# Altium PCB ASIC_test_adapter.PcbDoc
Units mm, origin at the board's own origin, x right, y up, seen from the top; angles counter-clockwise.
Board outline 49.2 x 49.2 mm, 4 copper layers (Top Layer, Layer 1, Layer 2, Bottom Layer), stack 1.539 mm thick; 56 components, 61 nets, 303 pads, 71 vias.
Unrouted connection lines stored in the file: 57.
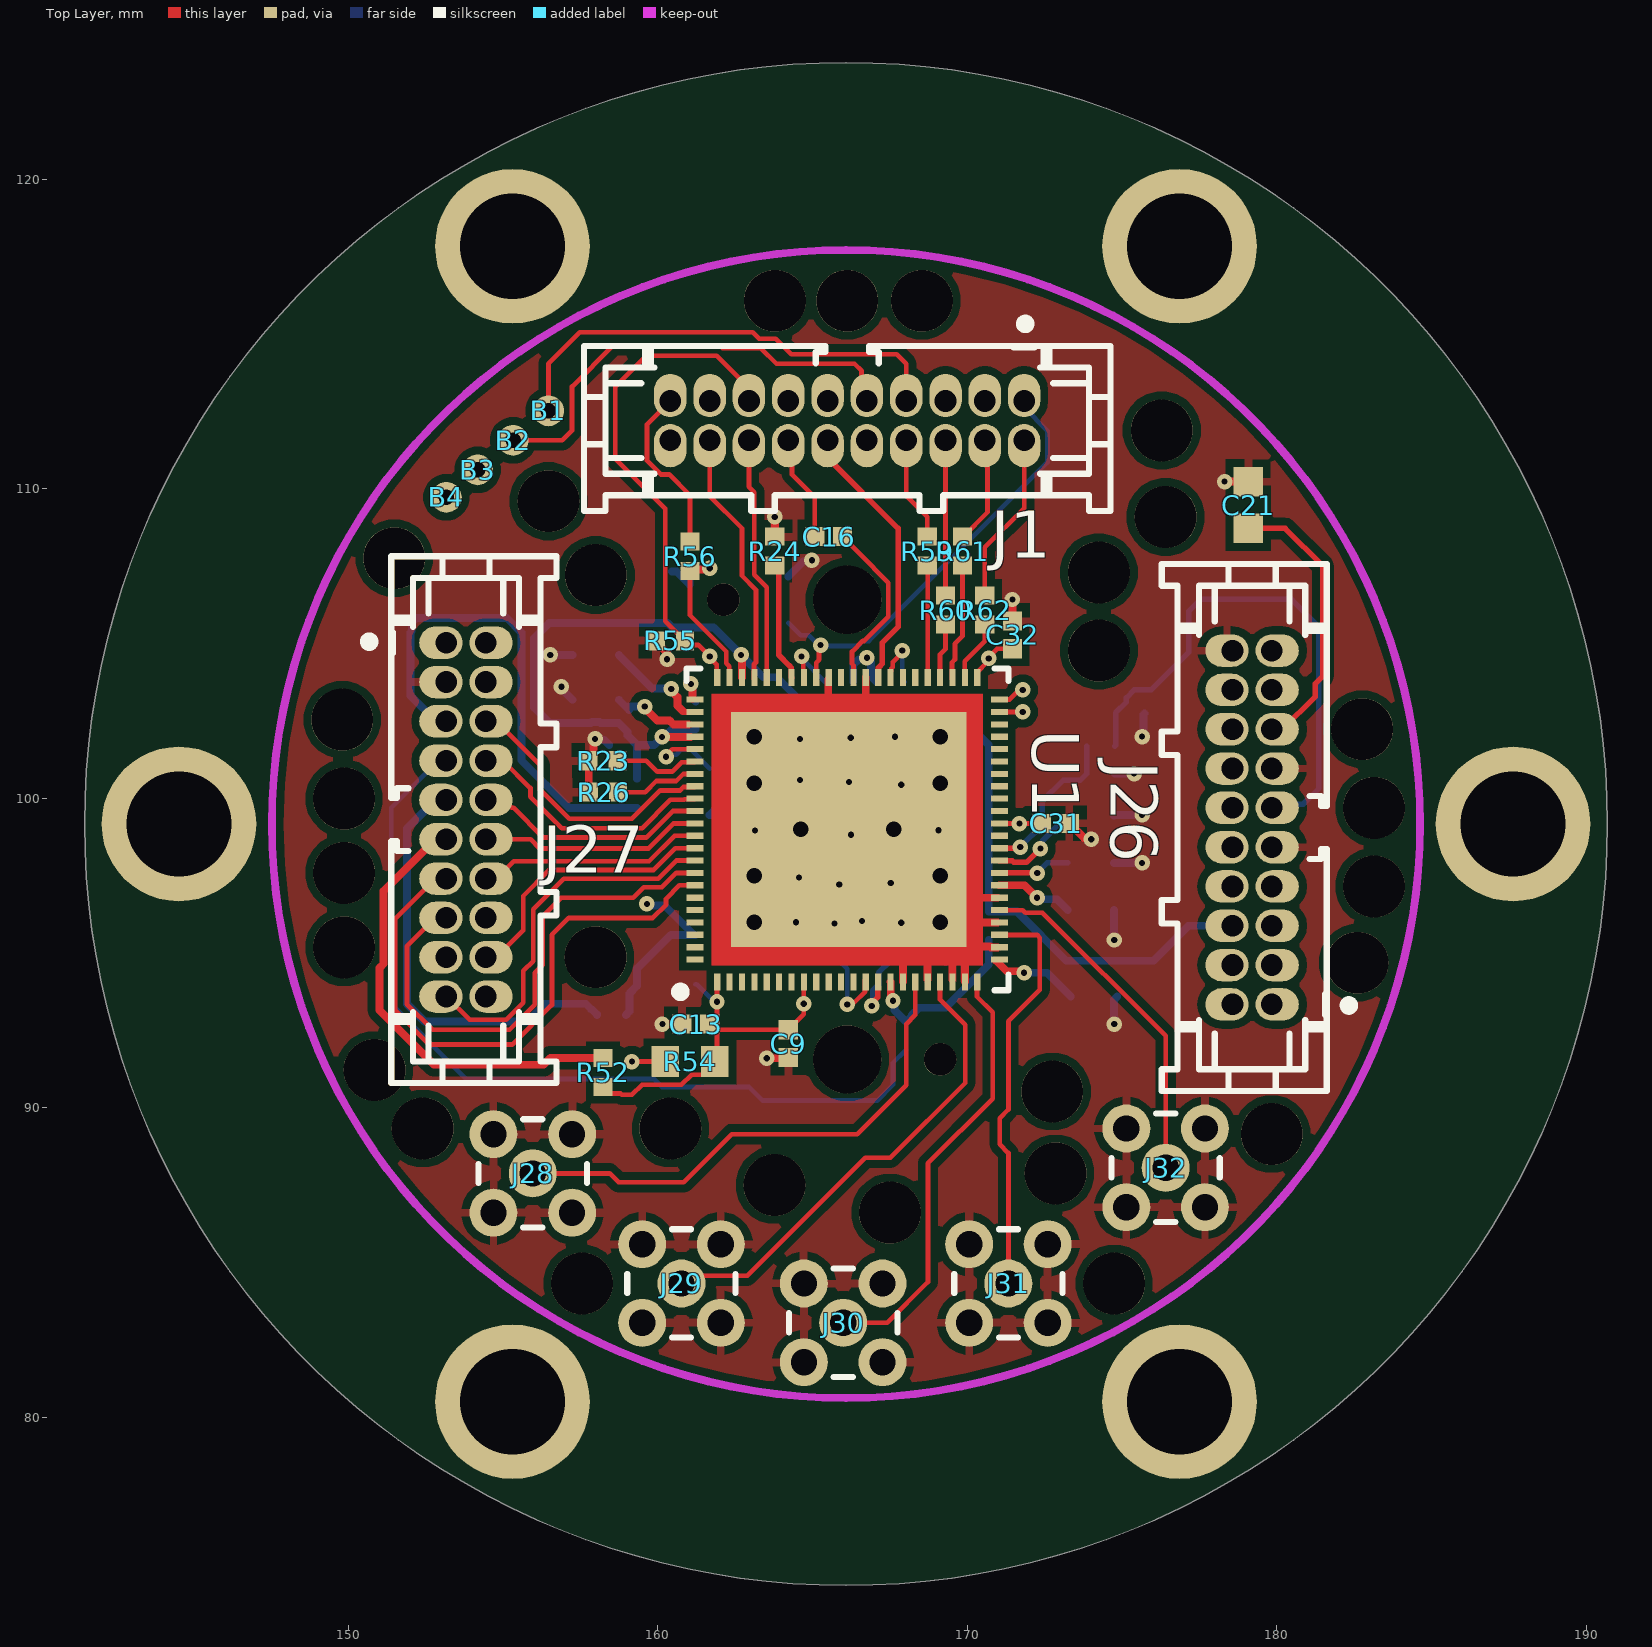
[diagram p0: Top Layer view]
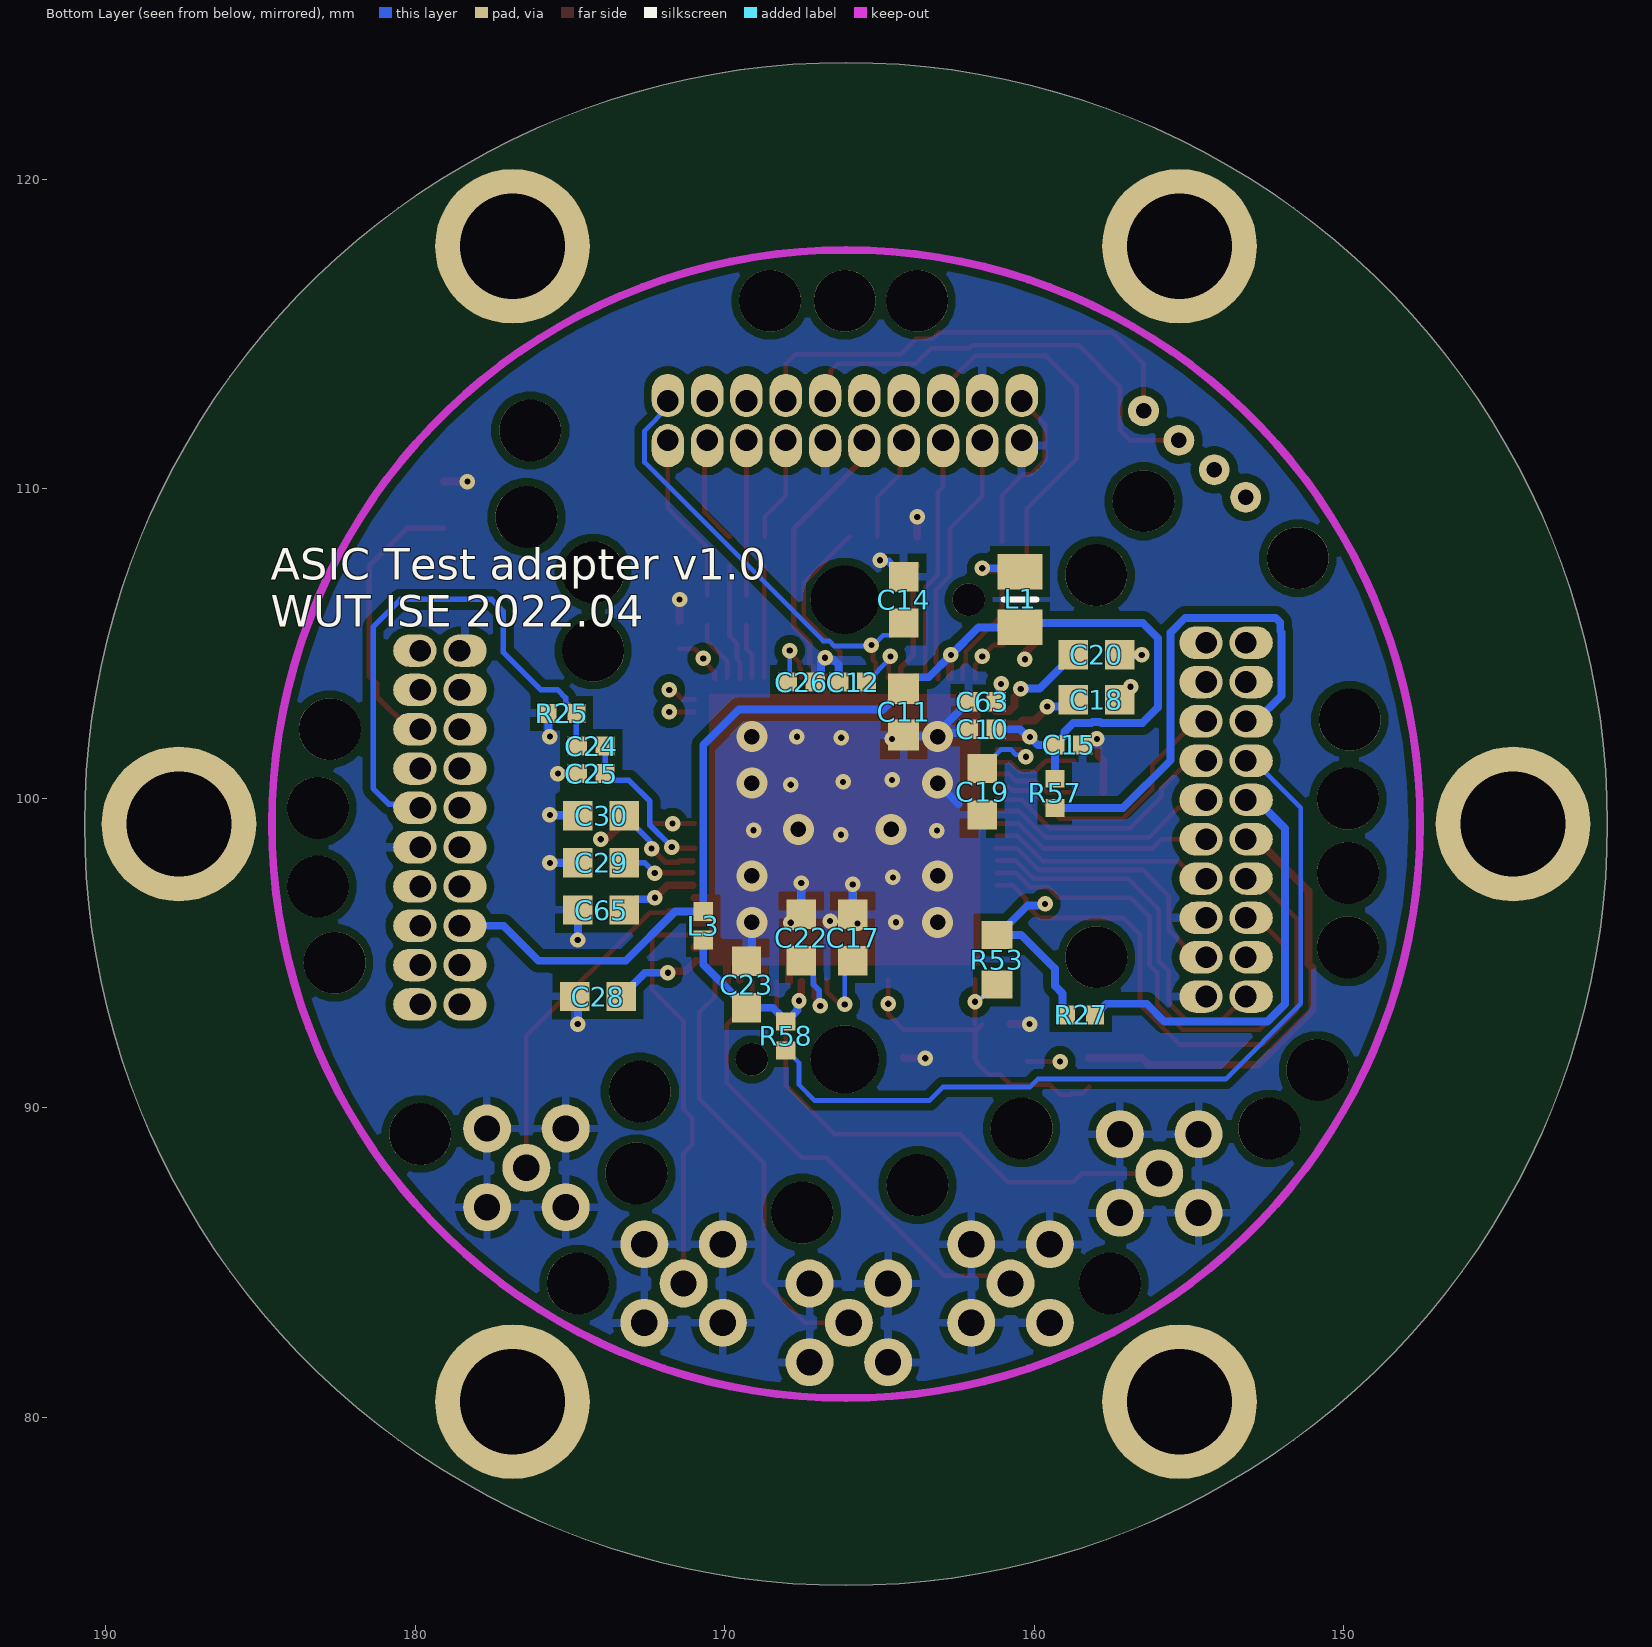
[diagram p1: Bottom Layer view, seen from below]
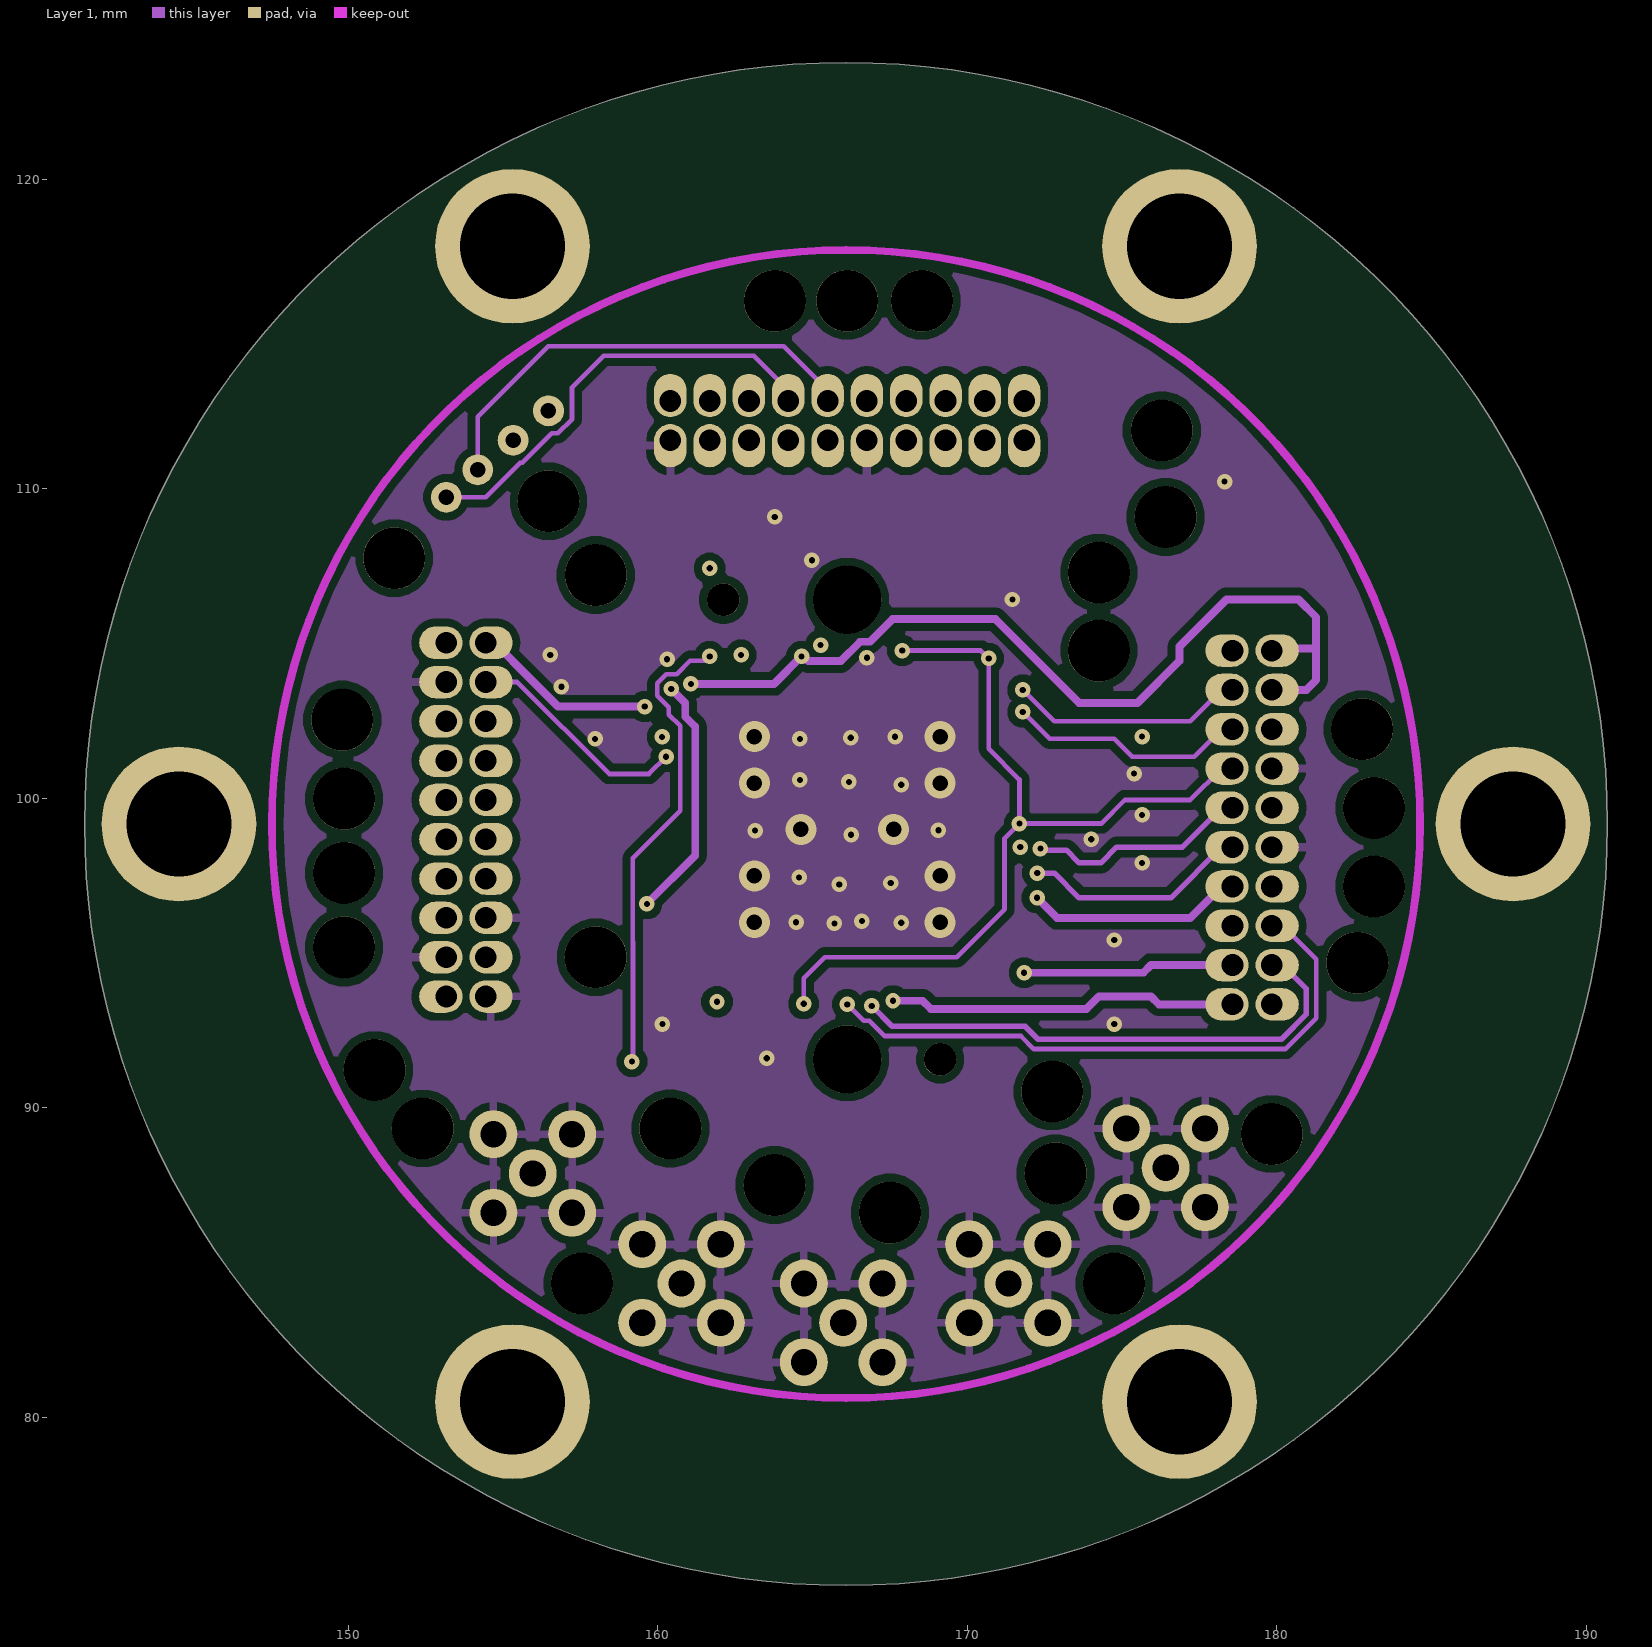
[diagram p2: Layer 1]
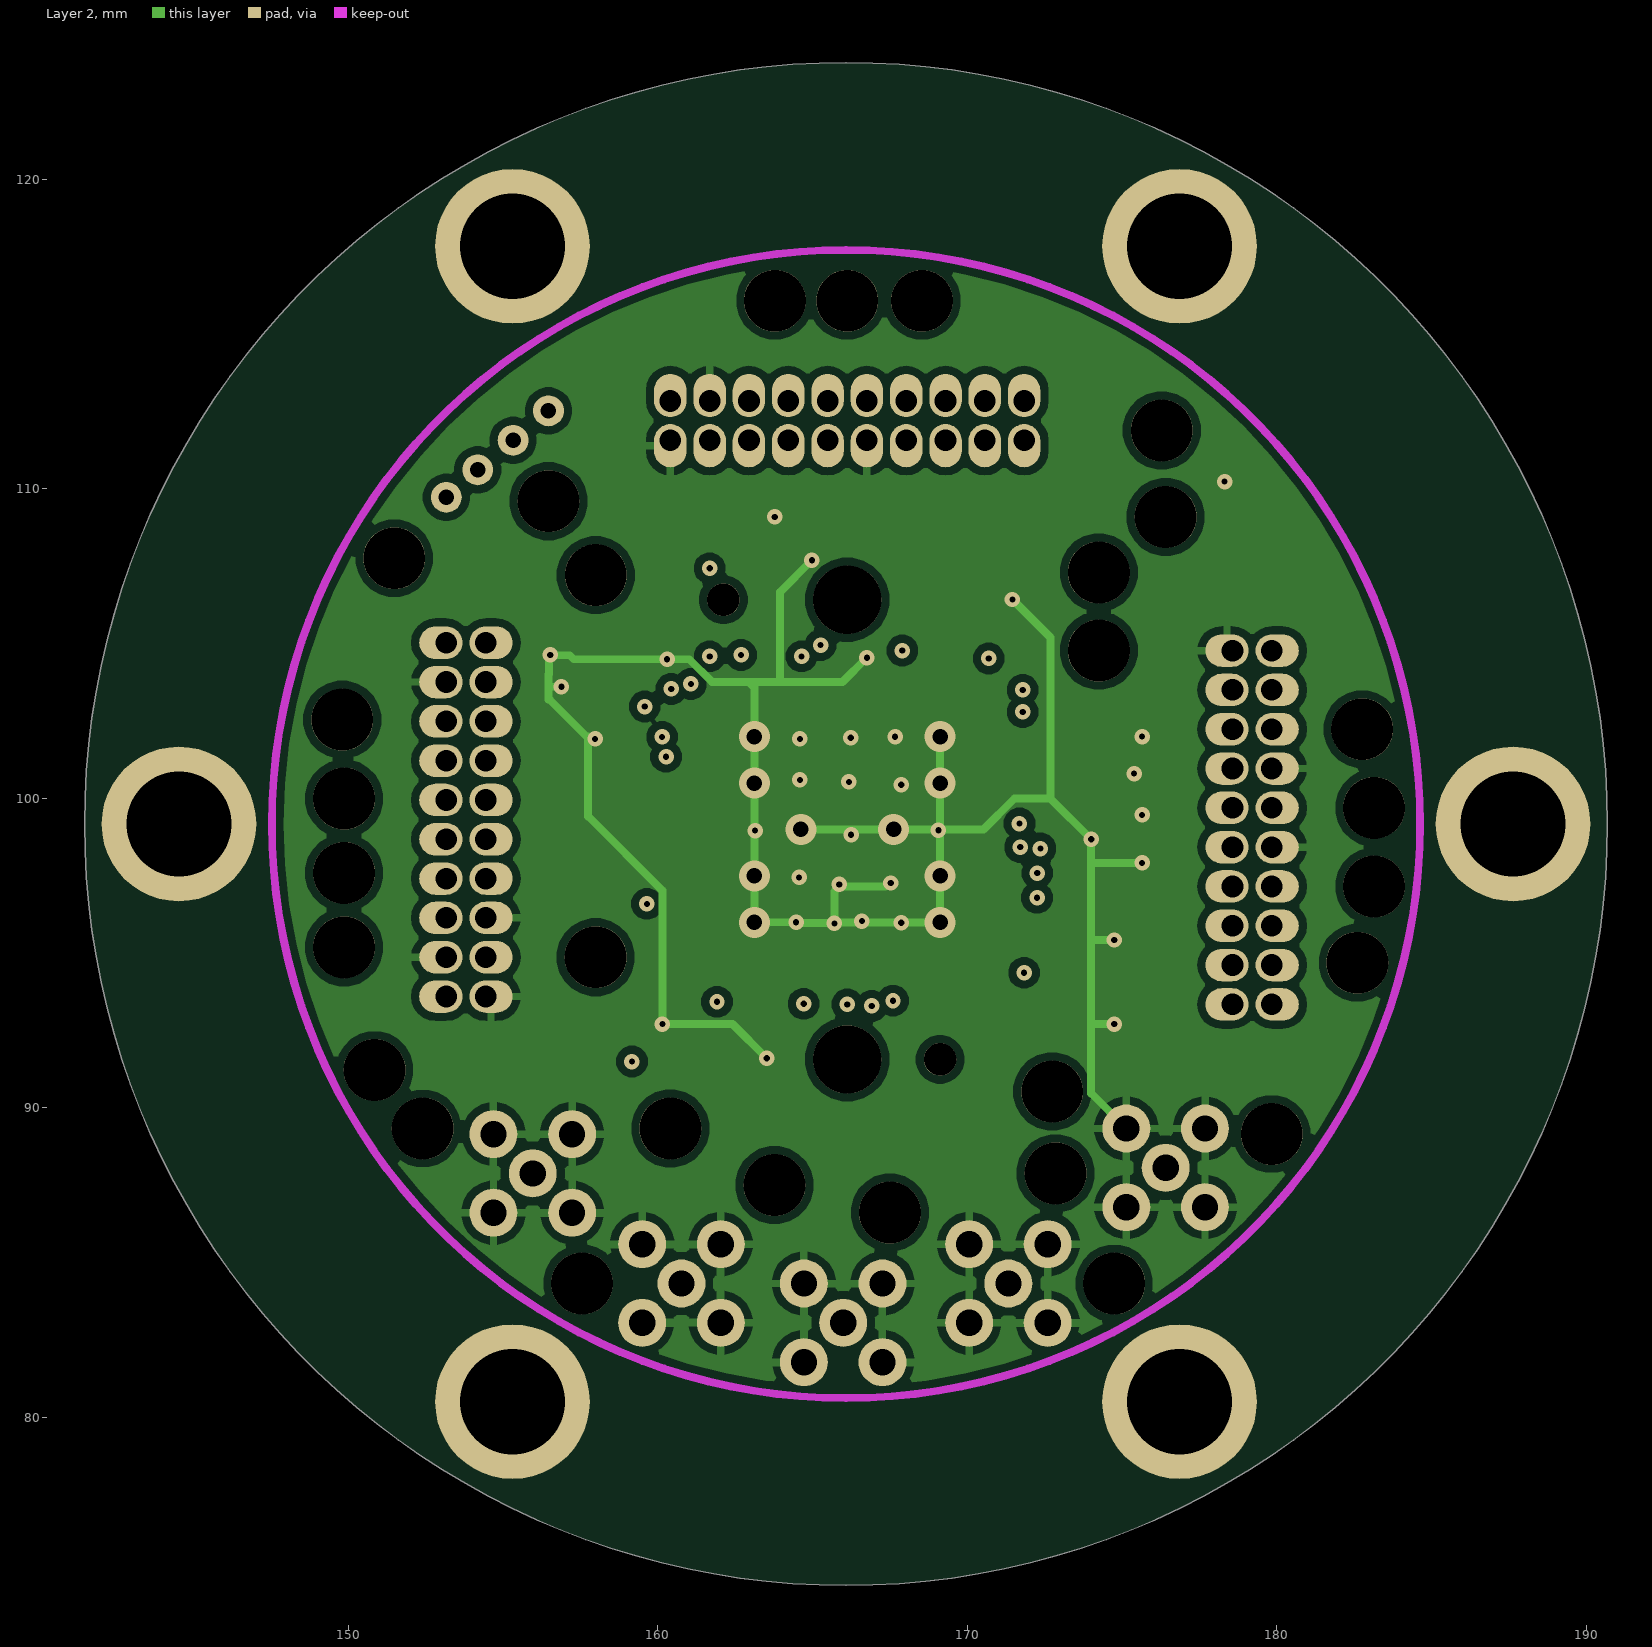
[diagram p3: Layer 2]
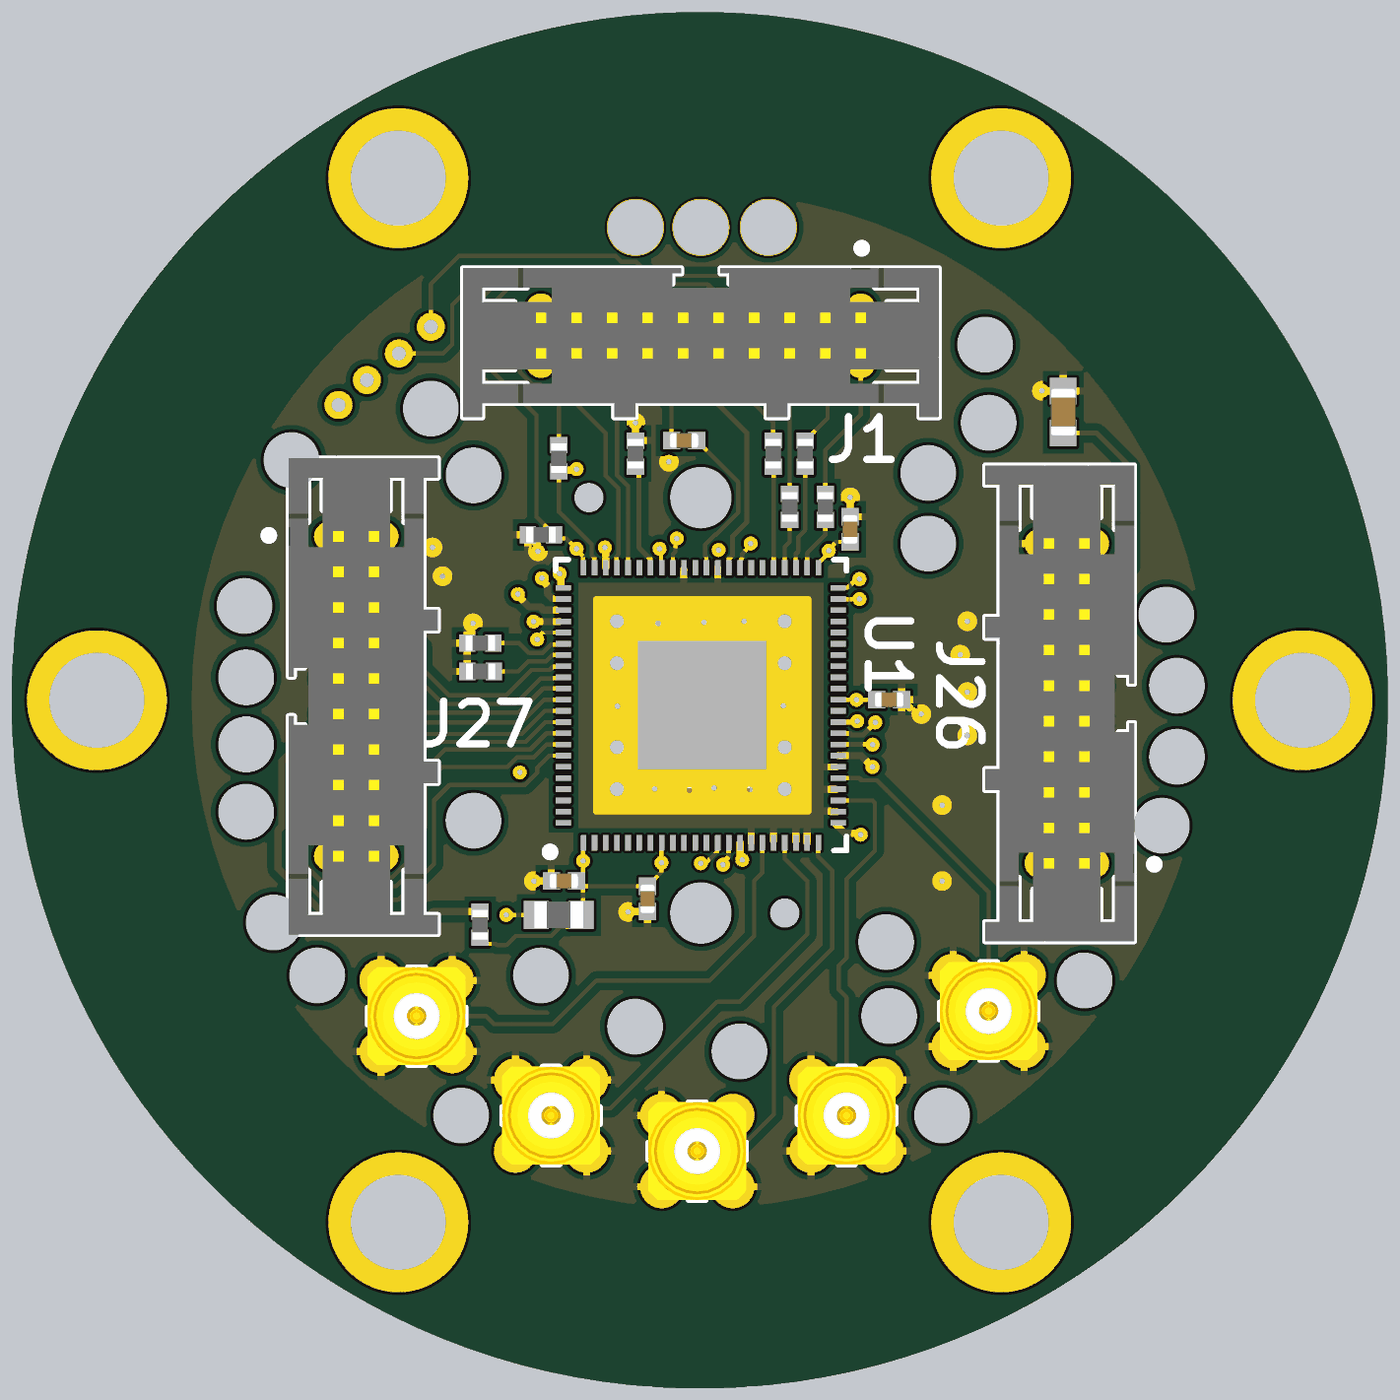
[diagram p4: 3D render of the assembled board from above, using the file's embedded part models]
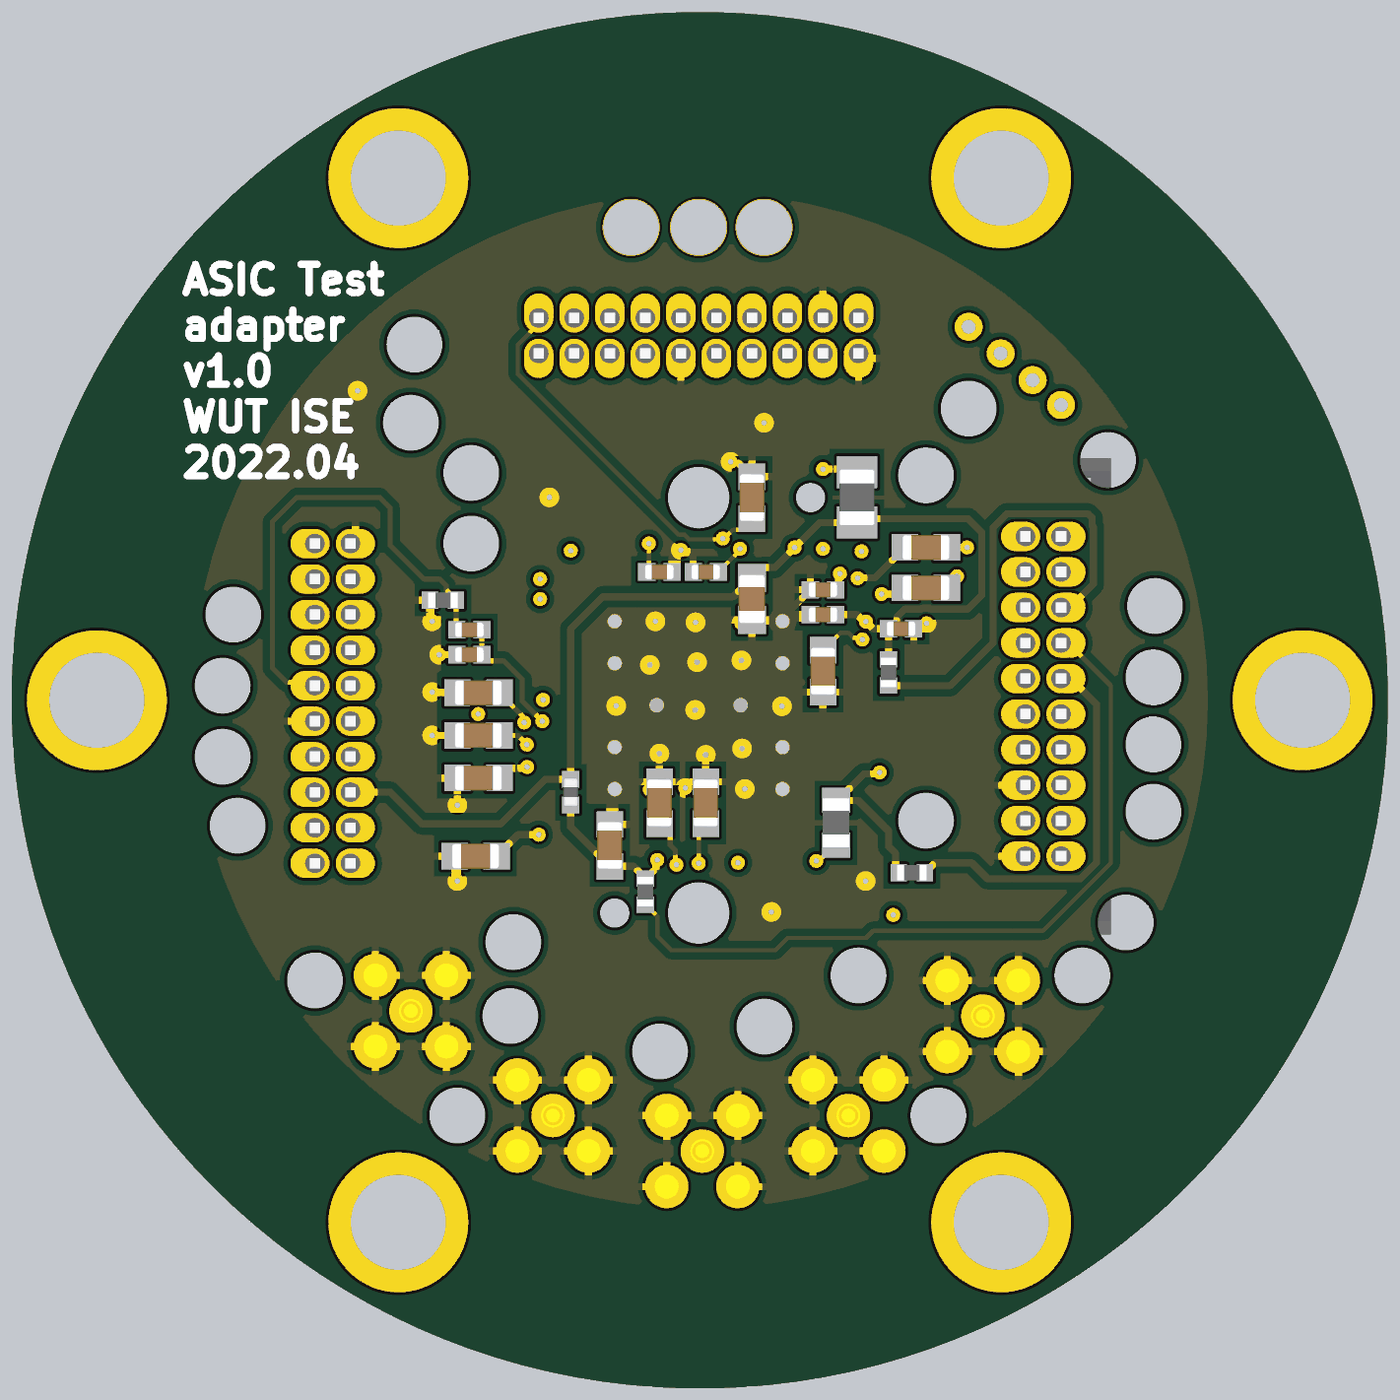
[diagram p5: 3D render of the assembled board from below, using the file's embedded part models]

## Layer stack, top to bottom
Top Solder: solder mask 0.0102, Solder Resist, Dk 3.5
Top Layer: signal copper 0.018
Dielectric 2: prepreg 0.1803, PP-021, Dk 4.7
Dielectric 4: prepreg 0.1803, PP-021, Dk 4.7
Layer 1: signal copper 0.035
Dielectric 1: core 0.7112, Core-039, Dk 4.8
Layer 2: signal copper 0.035
Dielectric 5: prepreg 0.1803, PP-021, Dk 4.7
Dielectric 3: prepreg 0.1803, PP-021, Dk 4.7
Bottom Layer: signal copper 0.018
Bottom Solder: solder mask 0.0102, Solder Resist, Dk 3.5

## Board outline
141.476,99.173 ccw(c166.076,99.173) 166.076,74.573 ccw(c166.076,99.173) 190.676,99.173 ccw(c166.076,99.173) 166.076,123.773 ccw(c166.076,99.173)

## Design rules (kind name [scope] priority, off if disabled: settings)
Clearance [All] p1: gap=0.127 ignorepadtopadclearanceinfootprint=FALSE except(0.254: Arc-Poly Track-Poly SMDPad-Poly THPad-Poly Via-Poly Fill-Poly Poly-Poly)
HoleSize [All] p1: absolutevalues=TRUE maxlimit=5.08 minlimit=0.2 maxpercent=80.000 minpercent=20.000
MinimumSolderMaskSliver [All] p1 off: minsoldermaskwidth=0.254
PolygonConnect Via [All vs IsVia] p1: connectstyle=Direct reliefconductorwidth=0.254 reliefentries=4 polygonreliefangle="90 Angle" airgapwidth=0.254
PolygonConnect [All] p2: connectstyle=Relief reliefconductorwidth=0.254 reliefentries=4 polygonreliefangle="90 Angle" airgapwidth=0.254
RoomDefinition MAIN [InComponentClass('MAIN')] p1 off: confinementstyle=ConfineIn formatcopy=TRUE lockcomponents=FALSE outline 159.004,72.644 152.019,72.644 152.019,65.532 159.004,65.532
RoutingVias [All] p1: holewidth=0.2 width=0.5 viastyle="Through Hole" minholewidth=0.2 minwidth=0.5 maxholewidth=0.711 maxwidth=1.27
SilkToSilkClearance [All] p1 off: silktosilkclearance=0.254
SilkToSolderMaskClearance [IsPad] p1 off: minsilkscreentomaskgap=0.254 clearancetoexposedcopper=TRUE
SolderMaskExpansion [All] p1: expansion=0.102 istentingtop=FALSE
Width [All] p1: maxlimit=2.54 minlimit=0.127 preferedwidth=0.254
26 further rules are at their usual default settings.

## Components (designator, comment, footprint, x,y, rotation, side; value= is the part's Value field where it differs from the comment)
B1 "Plated Hole" c100h50 156.464,112.522 r0 top
B2 "Plated Hole" c100h50 155.321,111.569 r0 top
B3 "Plated Hole" c100h50 154.178,110.617 r0 top
B4 "Plated Hole" c100h50 153.162,109.728 r0 top
C9 "1uF" CAPC1005X55N 164.211,92.075 r270 top
C10 "1uF" CAPC1005X55N 161.671,102.235 r0 bottom
C11 "10uF" CAPC1608X80N 164.211,102.792 r90 bottom
C12 "1uF" CAPC1005X55N 165.862,103.759 r0 bottom
C13 "1uF" CAPC1005X55N 161.221,92.71 r180 top
C14 "22uF" CAPC1608X90N 164.211,106.417 r90 bottom
C15 "1uF" CAPC1005X55N 158.877,101.727 r0 bottom
C16 "22pF" CAPC1005X55N 165.516,108.458 r0 top
C17 "22uF" CAPC1608X90N 165.862,95.504 r270 bottom
C18 "22uF" CAPC1608X90N 157.988,103.188 r180 bottom
C19 "22uF" CAPC1608X90N 161.671,100.215 r270 bottom
C20 "22uF" CAPC1608X90N 157.988,104.634 r0 bottom
C21 "22uF" CAPC1608X90N 179.07,109.474 r270 top
C22 "22uF" CAPC1608X90N 167.519,95.504 r270 bottom
C23 "22uF" CAPC1608X90N 169.291,93.986 r90 bottom
C24 "22pF" CAPC1005X55N 174.311,101.692 r180 bottom
C25 "22pF" CAPC1005X55N 174.311,100.803 r0 bottom
C26 "1uF" CAPC1005X55N 167.519,103.759 r0 bottom
C28 "22uF" CAPC1608X90N 174.089,93.599 r180 bottom
C29 "22uF" CAPC1608X90N 173.99,97.917 r180 bottom
C30 "22uF" CAPC1608X90N 173.99,99.441 r180 bottom
C31 "1uF" CAPC1005X55N 172.847,99.192 r180 top
C32 "1uF" CAPC1005X55N 171.453,105.283 r270 top
C63 "4.7uF" CAPC1005X55N 161.671,103.124 r180 bottom
C65 "22uF" CAPC1608X90N 173.99,96.393 r180 bottom
J1 "Header 20" 3M_45220-600230 166.116,112.204 r180 top
J26 "Header 20" 3M_45220-600230 179.197,99.06 r90 top
J27 "Header 20" 3M_45220-600230 153.797,99.314 r270 top
J28 "Coax_1Female_1Shield" SAMTEC_MMCX-J-P-H-ST-TH1 155.956,87.884 r0 top
J29 "Coax_1Female_1Shield" SAMTEC_MMCX-J-P-H-ST-TH1 160.761,84.328 r0 top
J30 "Coax_1Female_1Shield" SAMTEC_MMCX-J-P-H-ST-TH1 165.986,83.058 r0 top
J31 "Coax_1Female_1Shield" SAMTEC_MMCX-J-P-H-ST-TH1 171.323,84.328 r0 top
J32 "Coax_1Female_1Shield" SAMTEC_MMCX-J-P-H-ST-TH1 176.403,88.065 r0 top
L1 "4.7uH" INDC2012X145N 160.454,106.426 r270 bottom
L3 "100nH" INDC1005X55N 170.688,95.885 r270 bottom
R23 "10k" RESC1005X40N 158.231,101.219 r180 top
R24 "10k" RESC1005X40N 163.777,107.988 r90 top
R25 "100" RESC1005X40N 175.255,102.747 r180 bottom
R26 "10k" RESC1005X40N 158.242,100.203 r180 top
R27 "0" RESC1005X40N 158.496,93.005 r180 bottom
R52 "0" RESC1005X40N 158.224,91.148 r90 top
R53 "0R1" RESC1608X55N 161.203,94.792 r270 bottom
R54 "1k33" RESC1608X55N 161.036,91.498 r180 top
R55 "1k" RESC1005X40N 160.401,105.088 r180 top
R56 "33" RESC1005X40N 161.036,107.823 r90 top
R57 "0" RESC1005X40N 159.327,100.165 r270 bottom
R58 "0" RESC1005X40N 168.021,92.329 r270 bottom
R59 "33" RESC1005X40N 168.703,107.988 r90 top
R60 "33" RESC1005X40N 169.291,106.083 r90 top
R61 "33" RESC1005X40N 169.839,107.988 r90 top
R62 "33" RESC1005X40N 170.561,106.083 r90 top
U1 "CCNV1_C1" "QFN88-0,4(10X10) - PODSTAWKA 2 PASTA" 166.116,98.992 r90 top

## Footprints (in the part's own frame and the unit in brackets; to place one, negate y for a bottom-side part, rotate by r counter-clockwise, add the part's x,y. Pads: shape width x height; smd on the part's side, far side on the other; paste and mask are expansions set on the pad)
3M_45220-600230 [mm] "20 Contacts - 1.27mm (0.050\") Pitch - Shrouded Boardmount Vertical Header Without Latch/Ejectors, 452 Series"
  oval 1.05x1.4 hole 0.7 copper offset 0,-0.175: 1(-5.715,-0.635) 3(-4.445,-0.635) 5(-3.175,-0.635) 7(-1.905,-0.635) 9(-0.635,-0.635) 11(0.635,-0.635) 13(1.905,-0.635) 15(3.175,-0.635) 17(4.445,-0.635) 19(5.715,-0.635)
  oval 1.05x1.4 hole 0.7 copper offset 0,0.175: 2(-5.715,0.635) 4(-4.445,0.635) 6(-3.175,0.635) 8(-1.905,0.635) 10(-0.635,0.635) 12(0.635,0.635) 14(1.905,0.635) 16(3.175,0.635) 18(4.445,0.635) 20(5.715,0.635)
  silkscreen extent -8.51,-3.28 8.51,2.92, body extent -8.51,-2.41 8.51,2.92, height 5.65
c100h50 [mm] "Plated Through Hole: Hole Dia.=0.5mm Pad Dia.=1.0mm"
  round 1 hole 0.5: 1(0,0)
CAPC1005X55N [mm] "Capacitor, Non-Polarized, Chip; 1.00mm L X 0.50mm W X 0.70mm H, IPC Medium Density"
  rect 0.62x0.62 smd: 1(-0.45,0) 2(0.45,0)
  body extent -0.52,-0.27 0.53,0.28, height 0.55
CAPC1608X80N [mm] "Chip Capacitor, Body 1.6x0.8mm IPC Medium Density"
  rect 1x1 smd: 1(-0.75,0) 2(0.75,0)
  body extent -0.87,-0.47 0.88,0.48, height 0.8
CAPC1608X90N [mm] "Chip Capacitor, Body 1.6x0.8mm IPC Medium Density"
  rect 0.95x0.95 smd: 1(-0.75,0) 2(0.75,0)
  body extent -0.85,-0.45 0.85,0.45, height 0.9
INDC1005X55N [mm] "Chip Inductor, 2-Leads, EIA 0402, Metric 1005, Body 1x0.5mm, 0402IPC Medium Density"
  rect 0.6x0.62 smd: 1(-0.46,0) 2(0.46,0)
  body extent -0.52,-0.27 0.53,0.28, height 0.55
INDC2012X145N [mm] "Chip Inductor, EIA 0805, Metric 2012, Body 2.0x1.25mm, IPC Medium Density"
  rect 1.15x1.45 smd: 1(-0.9,0) 2(0.9,0)
  silkscreen extent 0,-0.53 0,0.53, body extent -1,-0.62 1,0.63, height 1.45
"QFN88-0,4(10X10) - PODSTAWKA 2 PASTA" [mm] "QFN88 p=0,4mm LxWxH=10x10x0,8mm"
  round 1.05 hole 1.05 unplated: 0(-7.425,-3) 0(7.425,4)
  round 2.2 hole 2.2 unplated: 0(-7.425,0) 0(7.425,0)
  rect 0.55x0.2 smd mask+0.1: 1(-4.917,4.2) 2(-4.917,3.8) 3(-4.917,3.4) 4(-4.917,3) 5(-4.917,2.6) 6(-4.917,2.2) 7(-4.917,1.8) 8(-4.917,1.4) 9(-4.917,1) 10(-4.917,0.6) 11(-4.917,0.2) 12(-4.917,-0.2) 13(-4.917,-0.6) 14(-4.917,-1) 15(-4.917,-1.4) 16(-4.917,-1.8) 17(-4.917,-2.2) 18(-4.917,-2.6) 19(-4.917,-3) 20(-4.917,-3.4) 21(-4.917,-3.8) 22(-4.917,-4.2) 45(4.913,-4.2) 46(4.913,-3.8) 47(4.913,-3.4) 48(4.913,-3) 49(4.913,-2.6) 50(4.913,-2.2) 51(4.913,-1.8) 52(4.913,-1.4) 53(4.913,-1) 54(4.913,-0.6) 55(4.913,-0.2) 56(4.913,0.2) 57(4.913,0.6) 58(4.913,1) 59(4.913,1.4) 60(4.913,1.8) 61(4.913,2.2) 62(4.913,2.6) 63(4.913,3) 64(4.913,3.4) 65(4.913,3.8) 66(4.913,4.2)
  rect 0.2x0.55 smd mask+0.1: 23(-4.2,-4.912) 24(-3.8,-4.912) 25(-3.4,-4.912) 26(-3,-4.912) 27(-2.6,-4.912) 28(-2.2,-4.912) 29(-1.8,-4.912) 30(-1.4,-4.912) 31(-1,-4.912) 32(-0.6,-4.912) 33(-0.2,-4.912) 34(0.2,-4.912) 35(0.6,-4.912) 36(1,-4.912) 37(1.4,-4.912) 38(1.8,-4.912) 39(2.2,-4.912) 40(2.6,-4.912) 41(3,-4.912) 42(3.4,-4.912) 43(3.8,-4.912) 44(4.2,-4.912) 67(4.2,4.913) 68(3.8,4.913) 69(3.4,4.913) 70(3,4.913) 71(2.6,4.913) 72(2.2,4.913) 73(1.8,4.913) 74(1.4,4.913) 75(1,4.913) 76(0.6,4.913) 77(0.2,4.913) 78(-0.2,4.913) 79(-0.6,4.913) 80(-1,4.913) 81(-1.4,4.913) 82(-1.8,4.913) 83(-2.2,4.913) 84(-2.6,4.913) 85(-3,4.913) 86(-3.4,4.913) 87(-3.8,4.913) 88(-4.2,4.913)
  rect 7.6x7.6 smd paste-1.5: 89(0,-0.05)
  silkscreen extent -5.39,-5.21 5.21,5.54, body extent -2.55,-2.52 2.53,2.56, height 2.54
RESC1005X40N [mm] "Chip Resistor, EIA 0402, Metric 1005, Body 1.0x0.5mm, IPC Medium Density"
  rect 0.58x0.62 smd: 1(-0.47,0) 2(0.47,0)
  body extent -0.52,-0.27 0.53,0.28, height 0.4
RESC1608X55N [mm] "Chip Resistor, EIA 0603, Metric 1608, Body 1.6x0.8mm, IPC Medium Density"
  rect 0.9x1 smd: 1(-0.8,0) 2(0.8,0)
  body extent -0.87,-0.47 0.88,0.48, height 0.55
SAMTEC_MMCX-J-P-H-ST-TH1 [mm] "Straight Through-hole 50 Ohm Micro Mini RF Jack, MMCX Serie"
  round 1.55 hole 0.85: 1(0,0) 2(-1.27,-1.27) 2(-1.27,1.27) 2(1.27,-1.27) 2(1.27,1.27)
  silkscreen extent -1.75,-1.75 1.75,1.75, body extent -1.75,-1.75 1.75,1.75, height 4.35

## Part data
B1 B2 B3 B4: library part PLATED_HOLE0.5_PAD1.0, "Single Terminal Socket", Author="CERN DEM JMW", Component Type="Standard (No BOM)", ComponentHeight=0mm, CreateDate=06.01.2020, Family="Plated Hole", HelpURL=Undefined, LatestRevisionDate=06.01.2020, Mounted=No, PackageDescription="Plated Through Hole: Hole Dia.=0.5mm Pad Dia.=1.0mm", Part Description="Plated Through Hole: Hole Dia.=0.5mm Pad Dia.=1.0mm", Part Number=PLATED_HOLE0.5_PAD1.0, Pin Count=1, Sense=No, SMD=No, Socket=No, Status=None
C9 C10 C12 C13 C15 C26 C31 C32: library part CC0402_1UF_16V_10%_X5R, "Non-polarised capacitor", Case=0402, Manufacturer=GENERIC, Manufacturer1 ComponentHeight=0.55mm, Manufacturer1 Example=TDK, Manufacturer1 Part Number=C1005X5R1C105KT, Tolerance=±10%, Voltage=16V, Author="CERN DEM JLC", Component Type=Standard, CreateDate=25.10.2012, HelpURL=\\cern.ch\dfs\Applications\Altium\Datasheets\CC0402_X5R_TDK_C.pdf, LatestRevisionDate=25.10.2012, Manufacturer Part Number=CC0402_1UF_16V_10%_X5R, Mounted=Yes, Part Description="SMD Multilayer Chip Ceramic Capacitor", Part Number=CC0402_1UF_16V_10%_X5R, Pin Count=2, Sense=No, SMD=Yes, Socket=No, Status=Preferred, TC=X5R
C11: library part CC0603_10UF_10V_10%_X5R, "Non-polarised capacitor", Case=0603, Manufacturer=GENERIC, Manufacturer1 ComponentHeight=0.8mm, Manufacturer1 Example=MURATA, Manufacturer1 Part Number=GRM188R61A106KE69D, Tolerance=±10%, Voltage=10V, Author="CERN DEM JLC", Component Type=Standard, CreateDate=31.01.2017, HelpURL=\\cern.ch\dfs\Applications\Altium\Datasheets\CC0603_MURATA_GRM188R61A106KE69D.pdf, LatestRevisionDate=31.01.2017, Manufacturer Part Number=CC0603_10UF_10V_10%_X5R, Mounted=Yes, Part Description="SMD Multilayer Chip Ceramic Capacitor", Part Number=CC0603_10UF_10V_10%_X5R, Pin Count=2, Sense=No, SMD=Yes, Socket=No, Status=None, TC=X5R
C14 C17 C18 C19 C20 C21 C22 C23 C28 C29 C30 C65: library part CC0603_22UF_10V_20%_X5R, "Non-polarised capacitor", Case=0603, Manufacturer=GENERIC, Manufacturer1 ComponentHeight=0.9mm, Manufacturer1 Example=TDK, Manufacturer1 Part Number=C1608X5R1A226M080, Tolerance=±20%, Voltage=10V, Author="CERN DEM BC", Component Type=Standard, CreateDate=03.12.2020, HelpURL=\\cern.ch\dfs\Applications\Altium\Datasheets\CC0603_X5R_TDK_C.pdf, LatestRevisionDate=03.12.2020, Manufacturer Part Number=CC0603_22UF_10V_20%_X5R, Mounted=Yes, Part Description="SMD Multilayer Chip Ceramic Capacitor", Part Number=CC0603_22UF_10V_20%_X5R, Pin Count=2, Sense=No, SMD=Yes, Socket=No, Status=None, TC=X5R
C16 C24 C25: library part CC0402_22PF_50V_5%_C0G, "Non-polarised capacitor", Case=0402, Manufacturer=GENERIC, Manufacturer1 ComponentHeight=0.55mm, Manufacturer1 Example=KEMET, Manufacturer1 Part Number=C0402C220J5GACTU, Tolerance=±5%, Voltage=50V, Author="CERN DEM JLC", Component Type=Standard, CreateDate=03.12.2007, HelpURL="\\cern.ch\dfs\Applications\Altium\Datasheets\CC0402_C0G_KEMET_(Commercial Grade).pdf", LatestRevisionDate=03.12.2007, Manufacturer Part Number=CC0402_22PF_50V_5%_C0G, Mounted=Yes, Part Description="SMD Multilayer Chip Ceramic Capacitor", Part Number=CC0402_22PF_50V_5%_C0G, Pin Count=2, Sense=No, SMD=Yes, Socket=No, Status=Preferred, TC=C0G/NP0
C63: library part CC0402_4.7UF_10V_10%_X5R, "Non-polarised capacitor", Case=0402, Manufacturer=GENERIC, Manufacturer1 ComponentHeight=0.65mm, Manufacturer1 Example=TDK, Manufacturer1 Part Number=C1005X5R1A475K050, Tolerance=±10%, Voltage=10V, Author="CERN DEM BC", Component Type=Standard, CreateDate=10.01.2020, HelpURL=\\cern.ch\dfs\Applications\Altium\Datasheets\CC0402_X5R_TDK_C.pdf, LatestRevisionDate=10.01.2020, Manufacturer Part Number=CC0402_4.7UF_10V_10%_X5R, Mounted=Yes, Part Description="SMD Multilayer Chip Ceramic Capacitor", Part Number=CC0402_4.7UF_10V_10%_X5R, Pin Count=2, Sense=No, SMD=Yes, Socket=No, Status=Preferred, TC=X5R
J1 J26 J27: library part 3M_45220-600230, "Connector 20 Male", Manufacturer=3M, Manufacturer Part Number=45220-600230, Author="CERN DEM MR", Component Type=Standard, ComponentHeight=5.64mm, CreateDate=15.08.2019, Family="Header 20", HelpURL=\\cern.ch\dfs\Applications\Altium\Datasheets\3M_45220-600230.pdf, LatestRevisionDate=15.08.2019, Mounted=Yes, Part Description="20 Contacts - 1.27mm (0.050\") Pitch - Shrouded Boardmount Vertical Header Without Latch/Ejectors, 452 Series", Part Number=3M_45220-600230, Pin Count=20, PressFit=No, Sense=No, SMD=No, Socket=No, Status=None
J28 J29 J30 J31 J32: library part SAMTEC_MMCX-J-P-H-ST-TH1, Manufacturer=SAMTEC, Manufacturer Part Number=MMCX-J-P-H-ST-TH1, Author="CERN DEM JLC", Component Type=Standard, ComponentHeight=4.35mm, CreateDate=05.12.2012, HelpURL=\\cern.ch\dfs\Applications\Altium\Datasheets\SAMTEC_MMCX-J-P-H-ST-TH1.pdf, LatestRevisionDate=05.12.2012, Mounted=Yes, Part Description="Straight Through-hole 50 Ohm Micro Mini RF Jack, MMCX Series", Part Number=SAMTEC_MMCX-J-P-H-ST-TH1, Pin Count=2, PressFit=No, Sense=No, SMD=No, Socket=No, Status=None
L1: library part IND0805_4.7UH_20%_KEMET_L-DWI, "Inductor With Core", Case=0805, Manufacturer=KEMET, Manufacturer Part Number=L0805C4R7MDWIT, Power=360mA, Resistance=0.5R, Tolerance=±20%, Author="CERN DEM JLC", Component Type=Standard, ComponentHeight=1.85mm, CreateDate=26.01.2010, HelpURL="\\cern.ch\dfs\Applications\Altium\Datasheets\IND0805_KEMET_L-DWI .pdf", LatestRevisionDate=26.01.2010, Mounted=Yes, Part Description="Wire Wound Chip Inductors", Part Number=IND0805_4.7UH_20%_KEMET_L-DWI, Pin Count=2, Sense=No, SMD=Yes, Socket=No
L3: library part IND0402_100NH_5%_TDK_MLJ1005, "Inductor", Case=0402, Manufacturer=TDK, Manufacturer Part Number=MLJ1005WR10J, Power=400mA, Resistance=0.30R, Tolerance=±5%, Author="CERN DEM BC", Component Type=Standard, ComponentHeight=0.55mm, CreateDate=13.07.2020, HelpURL=\\cern.ch\dfs\Applications\Altium\Datasheets\IND0402_TDK_MLJ1005.pdf, LatestRevisionDate=13.07.2020, Mounted=Yes, Part Description="SMD Inductor for Standard Circuits, MLJ Series", Part Number=IND0402_100NH_5%_TDK_MLJ1005, Pin Count=2, Sense=No, SMD=Yes, Socket=No
R23 R24 R26: library part R0402_10K_1%_0.0625W_100PPM, "Resistor - 1%", Case=0402, Manufacturer=GENERIC, Manufacturer1 ComponentHeight=0.4mm, Manufacturer1 Example="YAGEO PHYCOMP", Manufacturer1 Part Number=232270671003L, Power=0.0625W, Tolerance=±1%, Author="CERN DEM JLC", Component Type=Standard, CreateDate=03.12.2007, HelpURL=\\cern.ch\dfs\Applications\Altium\Datasheets\R0402_Phycomp_RC0402.pdf, LatestRevisionDate=17.10.2012, Manufacturer Part Number=R0402_10K_1%_0.0625W_100PPM, Mounted=Yes, Part Description="General Purpose Thick Film Chip Resistor", Part Number=R0402_10K_1%_0.0625W_100PPM, Pin Count=2, PressFit=No, Sense=No, SMD=Yes, Socket=No, Status="Not Recommended", TC=±100ppm/°C
R25: library part R0402_100R_1%_0.0625W_100PPM, "Resistor - 1%", Case=0402, Manufacturer=GENERIC, Manufacturer1 ComponentHeight=0.4mm, Manufacturer1 Example="YAGEO PHYCOMP", Manufacturer1 Part Number=232270671001L, Power=0.0625W, Tolerance=±1%, Author="CERN DEM JLC", Component Type=Standard, CreateDate=03.12.2007, HelpURL=\\cern.ch\dfs\Applications\Altium\Datasheets\R0402_Phycomp_RC0402.pdf, LatestRevisionDate=17.10.2012, Manufacturer Part Number=R0402_100R_1%_0.0625W_100PPM, Mounted=Yes, Part Description="General Purpose Thick Film Chip Resistor", Part Number=R0402_100R_1%_0.0625W_100PPM, Pin Count=2, PressFit=No, Sense=No, SMD=Yes, Socket=No, Status="Not Recommended", TC=±100ppm/°C
R27 R52 R57 R58: library part R0402_0R_JUMPER, "Resistor", Case=0402, Manufacturer=GENERIC, Manufacturer1 ComponentHeight=0.4mm, Manufacturer1 Example="YAGEO PHYCOMP", Manufacturer1 Part Number=232270591001L, Author="CERN DEM JLC", Component Type=Standard, CreateDate=03.12.2007, HelpURL=\\cern.ch\dfs\Applications\Altium\Datasheets\R0402_Phycomp_RC0402.pdf, LatestRevisionDate=17.10.2012, Manufacturer Part Number=R0402_0R_JUMPER, Mounted=Yes, Part Description="1A (0.05R Max DC Resistance) Zero Ohm Jumper", Part Number=R0402_0R_JUMPER, Pin Count=2, PressFit=No, Sense=No, SMD=Yes, Socket=No, Status="Not Recommended"
R53: library part R0603_0R1_1%_0.1W_200PPM, "Resistor - 1%", Case=0603, Manufacturer=GENERIC, Manufacturer1 ComponentHeight=0.55mm, Manufacturer1 Example=BOURNS, Manufacturer1 Part Number=CRL0603-FW-R100ELF, Power=0.1W, Tolerance=±1%, Author="CERN DEM JMW", Component Type=Standard, CreateDate=26.11.2019, HelpURL=\\cern.ch\dfs\Applications\Altium\Datasheets\R0603_BOURNS_CRL.pdf, LatestRevisionDate=26.11.2019, Manufacturer Part Number=R0603_0R1_1%_0.1W_200PPM, Mounted=Yes, Part Description="Low Value Chip Resistor", Part Number=R0603_0R1_1%_0.1W_200PPM, Pin Count=2, PressFit=No, Sense=No, SMD=Yes, Socket=No, Status=Preferred, TC=±200ppm/°C
R54: library part R0603_1K33_0.1%_0.063W_10PPM, "Resistor - 0.1%", Case=0603, Manufacturer=GENERIC, Manufacturer1 ComponentHeight=0.5mm, Manufacturer1 Example="TYCO HOLSWORTHY", Manufacturer1 Part Number=RN73C1J1K33BTDF, Power=0.063W, Tolerance=±0.1%, Author="CERN DEM JLC", Component Type=Standard, CreateDate=03.12.2007, HelpURL=\\cern.ch\dfs\Applications\Altium\Datasheets\R0603_Tyco_RN73.pdf, LatestRevisionDate=13.03.2008, Manufacturer Part Number=R0603_1K33_0.1%_0.063W_10PPM, Mounted=Yes, Part Description="Thin Film Chip Resistor", Part Number=R0603_1K33_0.1%_0.063W_10PPM, Pin Count=2, PressFit=No, Sense=No, SMD=Yes, Socket=No, Status="Not Recommended", TC=±10ppm
R55: library part R0402_1K_1%_0.0625W_100PPM, "Resistor - 1%", Case=0402, Manufacturer=GENERIC, Manufacturer1 ComponentHeight=0.4mm, Manufacturer1 Example="YAGEO PHYCOMP", Manufacturer1 Part Number=232270671002L, Power=0.0625W, Tolerance=±1%, Author="CERN DEM JLC", Component Type=Standard, CreateDate=03.12.2007, HelpURL=\\cern.ch\dfs\Applications\Altium\Datasheets\R0402_Phycomp_RC0402.pdf, LatestRevisionDate=17.10.2012, Manufacturer Part Number=R0402_1K_1%_0.0625W_100PPM, Mounted=Yes, Part Description="General Purpose Thick Film Chip Resistor", Part Number=R0402_1K_1%_0.0625W_100PPM, Pin Count=2, PressFit=No, Sense=No, SMD=Yes, Socket=No, Status="Not Recommended", TC=±100ppm/°C
R56 R59 R60 R61 R62: library part R0402_33R_1%_0.0625W_100PPM, "Resistor - 1%", Case=0402, Manufacturer=GENERIC, Manufacturer1 ComponentHeight=0.4mm, Manufacturer1 Example="YAGEO PHYCOMP", Manufacturer1 Part Number=232270673309L, Power=0.0625W, Tolerance=±1%, Author="CERN DEM JLC", Component Type=Standard, CreateDate=03.12.2007, HelpURL=\\cern.ch\dfs\Applications\Altium\Datasheets\R0402_Phycomp_RC0402.pdf, LatestRevisionDate=17.10.2012, Manufacturer Part Number=R0402_33R_1%_0.0625W_100PPM, Mounted=Yes, Part Description="General Purpose Thick Film Chip Resistor", Part Number=R0402_33R_1%_0.0625W_100PPM, Pin Count=2, PressFit=No, Sense=No, SMD=Yes, Socket=No, Status="Not Recommended", TC=±100ppm/°C
U1: "Układ scalony"

## Free pads (board coordinates)
  round 5 hole 3.4: 3(155.301,117.836) 4(144.526,99.173) 5(155.301,80.51) 6(176.851,80.51) 7(187.626,99.173) 8(176.851,117.836)
  round 2 hole 2: q(166.116,116.078) q16(163.777,116.078) q17(168.529,116.078)
  round 2 hole 2 unplated: q1(176.276,111.887) q2(176.403,109.093) q3(183.134,99.695) q4(149.86,97.592) q5(163.764,87.506) q5(167.495,86.617) q5(172.847,87.884) q6(160.401,89.335) q7(174.244,107.298) q8(157.988,94.869) q9(152.4,89.335) q10(157.546,84.328) q11(174.74,84.328) q12(179.832,89.154) q13(183.134,97.155) q14(150.846,91.228) q14(151.481,107.76) q14(174.244,104.775) q14(182.596,94.691) q15(156.464,109.601) q18(182.753,102.235) q19(149.802,102.543) q19(149.86,99.992) q19(157.99,107.212) q19(172.739,90.529) q20(149.86,95.188)

## Via types
v1: diameter 0.5, hole 0.2, Top Layer to Bottom Layer, 61 vias
v2: diameter 1, hole 0.5, Top Layer to Bottom Layer, tented bottom, 10 vias

## Nets (pads, with @x,y where several pads share a name; then routed paths per layer and width w, separated by ;. In a path a pad name is that pad's centre, name@x,y a point inside that pad or via, vN(x,y) a via of type N, cw(c..) or ccw(c..) an arc to the next point about the centre after c; other vN are vias at no path point)
DBG_BREAK: J27.8 U1.75 | length 8.2
  Top Layer w0.152: J27.8 154.995,101.219 155.88,100.333 155.88,100.055 156.896,99.039 159.491,99.039 160.404,99.953 160.84,99.953 160.856,99.968 161.18,99.968 U1.75
DBG_EN: J27.6 U1.74 | length 9
  Top Layer w0.152: J27.6 154.782,102.489 156.185,101.086 156.185,100.29 157.131,99.344 159.161,99.344 160.075,100.258 160.714,100.258 160.825,100.368 161.18,100.368 U1.74
DBG_RX: J27.12 U1.77 | length 7.2
  Top Layer w0.152: J27.12 155.887,98.679 156.185,98.381 159.695,98.381 160.506,99.192 U1.77
DBG_TX: J27.10 U1.76 | length 7.6
  Top Layer w0.152: J27.10 155.025,99.949 155.279,99.695 155.34,99.695 156.3,98.734 159.617,98.734 160.475,99.592 U1.76
DC_DC_EN: J1.18 U1.63 | length 8.4
  Top Layer w0.152: J1.18 161.671,109.769 162.716,108.724 162.716,107.192 163.166,106.743 163.166,104.394 163.103,104.331 U1.63@163.103,103.846
ERASE_FL: R23.1 U1.72 | length 2.8
  Top Layer w0.152: R23.1 159.624,101.219 159.976,100.867 160.462,100.867 160.763,101.168 161.18,101.168 U1.72
Gnd: C9.2 C10.2 C11.1 C12.2 C13.2 C14.2 C15.1 C17.1 C18.2 C19.2 C20.1 C21.1 C22.1 C23.2 C25.2 C26.1 C28.1 C29.1 C30.1 C31.1 C32.1 C63.1 C65.1 J1.10 J1.17 J1.20 J26.9 J26.13 J26.20 J27.3 J27.16 J27.17 J27.20 J28.2 J29.2 J30.2 J31.2 J32.2 R23.2 R24.2 R25.1 R26.2 R55.2 U1.16 U1.18 U1.20 U1.21 U1.24 U1.26 U1.28 U1.54 U1.57 U1.89 | length 131
  Top Layer w0.254: R26.2 157.767,100.208 157.767,101.213 R23.2 R23.2@157.924,101.382 ; R23.2@157.923,101.383 157.923,101.876 v1(157.97,101.923) ; R55.2 159.931,105.068 160.294,104.705 v1(160.294,104.496) ; v1(160.147,92.71) C13.2 ; v1(163.516,91.605) 164.191,91.605 C9.2 ; R24.2 v1(163.777,109.093) ; 165.481,102.792 165.503,102.814 U1.57@165.503,103.846 ; U1.54 166.716,99.542 U1.89 167.916,97.242 U1.16 ; U1.18@168.708,94.146 U1.89@168.708,95.996 ; U1.89@169.139,96.019 U1.89@169.916,95.242 ; U1.20@169.508,94.146 169.508,95.18 169.516,95.188 ; U1.89@169.839,95.988 U1.26@170.966,95.988 ; U1.89@169.839,96.788 U1.28@170.966,96.788 ; U1.21 U1.89@169.916,95.242 ; U1.24@170.966,95.188 170.759,95.188 170.734,95.213 169.945,95.213 U1.89@169.916,95.242 ; C32.1 v1(171.453,106.426) ; C31.1 v1@173.763,98.726 ; v1(178.308,110.236) 179.058,110.236 C21.1
  Layer 2 w0.254: v1@156.511,104.623 157.153,104.623 157.28,104.496 v1(160.294,104.496) 161.014,104.496 161.751,103.759 162.939,103.759 ; v1(156.522,104.634) 156.475,104.587 156.475,104.013 156.464,104.002 156.464,103.607 ; v1(156.882,103.607) 156.464,103.607 ; v1@157.746,101.981 157.756,101.971 157.923,101.971 v1(157.97,101.923) ; v1(163.516,91.605) 162.411,92.71 v1(160.147,92.71) 160.147,97.02 157.746,99.421 157.746,101.996 157.701,101.996 156.509,103.189 156.464,103.189 156.464,103.607 ; v1@164.463,95.996 164.479,95.98 165.683,95.98 v1(165.704,95.959) ; v1(164.463,96.001) 164.461,95.998 163.118,95.998 v2(163.116,95.996) v2(163.116,97.496) v2(163.116,100.496) v2(163.116,101.996) 163.116,103.582 162.939,103.759 ; v2(164.616,98.996) v2(167.616,98.996) v1@169.248,98.996 ; v1(164.973,107.696) 163.947,106.67 163.947,103.759 ; v1(165.861,97.22) 165.861,97.154 165.704,96.997 165.704,96.035 165.743,95.996 165.862,95.996 166.592,95.996 167.861,95.996 v2(169.116,95.996) v2(169.116,97.496) 169.116,98.864 v1@169.248,98.996 ; v1@165.862,97.155 v1@167.341,97.155 ; v1(166.751,104.545) 165.965,103.759 163.947,103.759 ; v1@169.116,99.039 v2(169.116,100.496) v2(169.116,101.996) ; v1(171.453,106.426) 172.684,105.195 172.684,99.992 ; v1(174.74,92.71) 173.997,92.71 ; v1(174.74,95.425) 174.045,95.425 173.997,95.377 ; J32.2@175.133,89.335 173.997,90.471 173.997,92.71 ; v1(175.641,97.917) 173.997,97.917 ; 162.939,103.759 163.947,103.759 ; v1@169.248,98.996 170.518,98.996 171.514,99.992 172.684,99.992 ; 172.684,99.992 v1(173.997,98.679) 173.997,97.917 ; 173.997,92.71 173.997,95.377 ; 173.997,95.377 173.997,97.917
  Bottom Layer w0.254: v1(156.522,104.634) C20.1 ; v1(156.882,103.607) 156.882,103.544 C18.2 ; v1(157.97,101.923) 158.017,101.876 158.253,101.876 158.265,101.889 C15.1 ; C19.2 C19.2@162.019,99.813 ; C10.2 162.241,102.115 162.997,102.115 v2(163.116,101.996) ; C63.1 163.116,102.129 v2(163.116,101.996) ; 162.433,99.813 v2(163.116,100.496) ; C11.1 164.165,101.996 v2(163.116,101.996) ; C14.2 164.693,107.649 ; v1(165.861,97.22) 165.861,96.255 C17.1 ; C12.2 166.312,104.315 166.495,104.498 ; v1(166.751,104.545) 166.886,104.41 166.886,103.942 C26.1 ; C22.1 v1(167.519,97.267) ; v2(169.116,95.996) 169.116,94.911 C23.2 ; v1(174.74,92.71) 174.74,93.5 C28.1 ; v1(174.74,95.425) C65.1 ; C29.1 v1(175.641,97.917) ; C30.1 174.764,99.465 v1(175.641,99.465) ; C25.2 174.762,100.802 175.384,100.802 v1(175.385,100.801) ; v1(175.641,101.996) 175.683,102.038 175.683,102.705 R25.1
  other v1: 167.861,95.981 166.592,96.034 164.562,97.448 166.239,98.827 163.137,98.958 169.062,98.971 167.861,100.438 166.172,100.534 164.586,100.597 164.586,101.92 166.227,101.958 167.662,101.994
GPIO24/vref_1v0: J26.16 U1.43 | length 8.6
  Top Layer w0.152: U1.43@170.966,102.788 171.78,102.788 v1(171.784,102.792)
  Layer 1 w0.152: v1(171.784,102.792) 172.652,101.923 174.74,101.923 175.318,101.346 177.323,101.346 178.212,102.235 J26.16
GPIO25isource_4u: J26.18 U1.44 | length 8.6
  Top Layer w0.152: U1.44@170.966,103.196 171.367,103.196 171.676,103.505 v1(171.784,103.505)
  Layer 1 w0.152: v1(171.784,103.505) 172.8,102.489 177.196,102.489 178.212,103.505 J26.18
GPIO26/testclk: J1.2 R62.2 | length 5.5
  Top Layer w0.152: R62.2 170.561,108.107 171.831,109.377 J1.2
GPIO27/testclk: J1.4 R61.2 | length 3.5
  Top Layer w0.152: R61.2 169.859,108.458 170.648,109.247 170.648,111.483 J1.4
GPIO28/testclk: J1.6 R60.2 | length 5
  Top Layer w0.152: R60.2 J1.6
GPIO29/testclk: J1.8 R59.2 | length 3.4
  Top Layer w0.152: J1.8 168.021,109.775 168.703,109.093 R59.2
Imeas_VDD18GO_N: J27.11 R52.2 | length 14.7
  Top Layer w0.254: J27.11 152.812,98.679 151.139,97.006 151.139,94.658 151.003,94.522 151.003,93.156 152.766,91.393 156.3,91.393 156.525,91.618 R52.2
Imeas_VDD18GO_P: J27.9 R27.2 | length 14.1
  Bottom Layer w0.254: J27.9 152.812,99.949 151.892,99.029 151.892,93.358 152.455,92.795 155.792,92.795 156.361,93.364 157.667,93.364 157.843,93.188 157.863,93.188 158.026,93.025 R27.2
Imeas_VDD22_N: J27.7 R58.2 | length 27.8
  Bottom Layer w0.152: J27.7 152.908,101.219 151.384,99.695 151.384,93.363 153.815,90.932 159.876,90.932 160.13,90.678 162.941,90.678 163.381,90.238 167.079,90.238 167.594,90.753 167.594,91.452 168.001,91.859 R58.2
Imeas_VDD22_P: J27.5 R57.2 | length 16.2
  Bottom Layer w0.254: J27.5 152.837,102.489 152.008,103.318 152.008,105.362 152.046,105.4 152.046,105.68 152.199,105.833 155.115,105.833 155.586,105.362 155.586,101.236 157.128,99.695 R57.2
LDO_EN: J1.16 U1.62 | length 7.9
  Top Layer w0.152: J1.16 162.941,110.068 163.116,109.893 163.116,107.223 163.516,106.823 U1.62
LDOGPIO_FB: J1.15 R54.2 R55.1 U1.66 | length 32.9
  Top Layer w0.152: v1(159.161,91.498) R54.2 ; U1.66@161.903,103.846 161.903,104.325 161.671,104.557 v1(161.671,104.588) 161.3,104.959 161.001,104.959 R55.1 160.871,105.108 160.657,105.322 160.637,105.322 160.236,105.723 160.236,109.364 158.623,110.977 158.623,113.305 159.618,114.3 161.903,114.3 162.941,113.262 J1.15
  Layer 1 w0.152: v1(159.161,91.498) 159.191,91.528 159.191,95.367 159.19,95.369 159.19,98.071 160.717,99.598 160.717,102.341 160.348,102.71 160.348,102.944 159.979,103.313 159.979,103.724 160.27,104.015 160.607,104.015 161.036,104.444 161.527,104.444 v1(161.671,104.588)
LNA_OUT1: J29.1 U1.19 | length 15.5
  Top Layer w0.152: J29.1 161.015,84.582 162.893,84.582 166.703,88.392 167.513,88.392 169.926,90.805 169.926,92.687 169.116,93.497 U1.19
LNA_OUT5: J31.1 U1.25 | length 13.2
  Top Layer w0.152: U1.25@170.966,95.588 172.25,95.588 172.339,95.499 172.339,93.811 171.323,92.795 171.323,89.949 171.04,89.666 171.04,88.824 171.323,88.54 J31.1
MIX1_IN: J28.1 U1.17 | length 16.9
  Top Layer w0.152: J28.1 158.439,87.884 158.728,87.595 160.832,87.595 162.391,89.154 166.443,89.154 168.021,90.732 168.021,92.71 168.316,93.005 U1.17
MIX5_IN: J32.1 U1.27 | length 11.4
  Top Layer w0.152: U1.27@170.966,96.388 171.786,96.388 171.864,96.309 172.423,96.309 176.403,92.329 J32.1
NetC16_2: C16.2 U1.55 | length 5.7
  Top Layer w0.152: C16.2 166.976,107.448 166.976,107.436 167.445,106.967 167.445,105.867 166.666,105.088 166.618,105.088 166.272,104.743 166.272,104.346 166.316,104.303 U1.55
NetC20_2: C20.2 R27.1 R53.1 U1.68 | length 17.3
  Top Layer w0.203: 160.811,102.814 160.832,102.794 161.252,102.794 U1.68@161.253,102.792
  Top Layer w0.254: v1(160.432,103.536) 160.432,103.47 160.632,103.27 160.632,102.994 160.811,102.814
  Layer 1 w0.254: v1(159.643,96.592) 161.207,98.156 161.207,102.318 160.884,102.641 160.884,103.085 v1(160.432,103.536)
  Bottom Layer w0.254: C20.2 159.82,103.552 160.417,103.552 v1(160.432,103.536) ; R27.1 159.08,93.119 159.08,93.696 159.327,93.943 159.327,94.5 160.419,95.592 R53.1 161.153,95.592 160.201,96.545 159.69,96.545 v1(159.643,96.592)
NetL1_1: L1.1 R56.1 U1.65 | length 6.6
  Top Layer w0.152: R56.1 161.036,105.918 162.208,104.746 162.208,104.367 162.303,104.272 U1.65@162.303,103.846
  Top Layer w0.254: R56.1 161.078,107.395 161.629,107.395 v1(161.671,107.436)
  Bottom Layer w0.254: L1.1 160.604,107.326 161.025,106.906 161.025,107.409 161.052,107.436 v1(161.671,107.436)
NetR59_1: R59.1 U1.49 | length 3.6
  Top Layer w0.152: R59.1 168.716,107.505 U1.49
NetR60_1: R60.1 U1.48 | length 1.8
  Top Layer w0.152: U1.48 169.116,104.652 169.291,104.827 R60.1
NetR61_1: R61.1 U1.47 | length 3.8
  Top Layer w0.152: U1.47@169.503,103.846 169.503,104.397 169.596,104.49 169.596,104.995 169.839,105.238 R61.1
NetR62_1: R62.1 U1.46 | length 2
  Top Layer w0.152: U1.46 169.916,104.426 170.561,105.071 R62.1
OSC_16M: C24.1 J26.11 R25.2 | length 17.4
  Bottom Layer w0.178: C24.1 174.785,101.716 R25.2 174.785,102.767 175.133,103.115 175.133,103.251 175.387,103.505 175.93,103.505 177.144,104.719 177.144,106.045 177.525,106.426 180.47,106.426 181.356,105.54 181.356,100.321 180.848,99.813 179.95,99.813 J26.11
OSC_32k: C16.1 J1.14 | length 3.5
  Top Layer w0.152: J1.14 164.328,111.452 164.328,110.466 165.066,109.728 C16.1
RF_IN: J30.1 U1.22 | length 14.1
  Top Layer w0.152: J30.1 167.406,83.058 168.724,84.376 168.724,88.206 170.815,90.297 170.815,93.091 170.308,93.598 U1.22@170.308,94.146
RSTN: J1.12 U1.53 | length 8.9
  Top Layer w0.178: J1.12 165.481,111.005 167.762,108.724 167.762,105.542 167.242,105.022 167.242,104.347 167.175,104.28 167.175,104.274 167.116,104.215 U1.53
RTCK: J27.18 U1.79 | length 8.9
  Top Layer w0.152: J27.18 154.782,94.869 155.648,95.735 155.648,96.847 156.488,97.687 159.863,97.687 160.564,98.388 U1.79@161.266,98.388
TCK: J27.19 U1.80 | length 12.1
  Top Layer w0.152: J27.19 153.916,92.845 155.094,92.845 155.648,93.399 155.648,94.426 155.967,94.746 155.967,96.421 156.954,97.408 160.015,97.408 160.599,97.992 U1.80
TDI: J27.13 U1.82 | length 18.9
  Top Layer w0.152: J27.13 152.812,97.409 151.511,96.108 151.511,93.151 152.616,92.047 155.297,92.047 156.577,93.327 156.577,95.592 157.124,96.139 159.831,96.139 160.263,96.571 160.263,96.759 160.696,97.192 U1.82
TDO: J27.14 U1.78 | length 7.3
  Top Layer w0.152: J27.14 154.782,97.409 155.34,97.967 159.711,97.967 160.537,98.792 U1.78
Test_CAP: C21.2 J26.15 | length 9.1
  Top Layer w0.178: C21.2 180.264,108.724 181.483,107.505 181.483,103.951 181.229,103.697 181.229,103.282 180.182,102.235 J26.15
TEST_MODE: R26.1 U1.73 | length 2.8
  Top Layer w0.152: R26.1 159.589,100.203 159.948,100.562 160.588,100.562 160.814,100.788 U1.73@161.266,100.788
Thermometer_1_1: B1.1 J1.7 | length 15.1
  Top Layer w0.152: B1.1 156.464,114.046 157.48,115.062 163.056,115.062 163.268,114.849 163.808,114.849 164.311,114.346 167.716,114.346 168.021,114.041 J1.7
Thermometer_1_2: B2.1 J1.9 | length 14.8
  Top Layer w0.152: B2.1 156.909,111.569 157.226,111.887 157.226,113.305 158.564,114.643 161.991,114.643 162.089,114.545 163.327,114.545 163.831,114.041 166.351,114.041 166.579,113.812 166.579,113.011 J1.9
Thermometer_1_3: B3.1 J1.11 | length 14.9
  Layer 1 w0.152: B3.1 154.178,112.331 156.451,114.605 164.066,114.605 165.481,113.19 J1.11
Thermometer_1_4: B4.1 J1.13 | length 14.4
  Layer 1 w0.152: B4.1 154.432,109.728 155.545,110.841 155.623,110.841 156.575,111.793 156.766,111.793 157.226,112.254 157.226,113.284 158.242,114.3 163.101,114.3 164.211,113.19 J1.13
TMS: J27.15 U1.81 | length 16.8
  Top Layer w0.152: J27.15 152.812,96.139 151.892,95.219 151.892,93.353 152.72,92.525 155.205,92.525 156.02,93.341 156.02,94.368 156.272,94.62 156.272,96.188 156.872,96.788 159.198,96.788 159.538,97.128 160.13,97.128 160.594,97.592 U1.81
VDD15_ADC: C30.2 J26.12 U1.31 | length 10.1
  Top Layer w0.178: U1.31 171.04,97.981 171.453,97.981 171.5,97.934 171.908,97.934 v1(172.355,98.381)
  Layer 1 w0.178: v1(172.355,98.381) 172.406,98.329 173.197,98.329 173.609,97.917 174.312,97.917 174.82,98.425 176.942,98.425 178.212,99.695 J26.12
  Bottom Layer w0.178: v1(172.355,98.381) 172.417,98.443 172.417,98.618 C30.2
VDD15_APLL1: C22.2 J26.3 U1.14 | length 19.7
  Top Layer w0.178: v1(166.909,93.294) 166.909,93.381 167.108,93.579 U1.14@167.108,94.146
  Layer 1 w0.178: v1(166.909,93.294) 167.565,92.638 171.861,92.638 172.281,92.219 180.139,92.219 180.948,93.028 180.948,93.849 180.182,94.615 J26.3
  Bottom Layer w0.178: v1(166.909,93.294) 166.94,93.324 166.94,93.793 167.133,93.986 167.133,94.368 C22.2
VDD15_APLL5: C65.2 J26.8 U1.29 | length 9.5
  Top Layer w0.254: U1.29 171.846,97.192 v1(172.25,96.788)
  Layer 1 w0.254: v1(172.25,96.788) 172.899,96.139 177.196,96.139 178.212,97.155 J26.8
  Bottom Layer w0.254: v1(172.25,96.788) 172.297,96.741 172.892,96.741 C65.2
VDD15_DPLL: C29.2 J26.10 U1.30 | length 9.7
  Top Layer w0.178: U1.30 172.25,97.592 v1(172.255,97.587)
  Layer 1 w0.178: v1(172.255,97.587) 172.81,97.587 173.609,96.788 176.575,96.788 178.212,98.425 J26.10
  Bottom Layer w0.178: v1(172.255,97.587) 172.255,97.597 172.575,97.917 C29.2
VDD15_IF: C17.2 J26.5 U1.13 | length 22.5
  Top Layer w0.152: v1(166.116,93.345) 166.183,93.412 166.351,93.412 166.692,93.753 166.692,94.13 U1.13@166.708,94.146
  Layer 1 w0.152: v1(166.116,93.345) 166.646,92.815 166.832,92.815 167.326,92.321 171.73,92.321 172.149,91.901 180.271,91.901 181.266,92.896 181.266,94.801 180.182,95.885 J26.5
  Bottom Layer w0.152: C17.2 166.116,94.5 v1@166.116,93.444
VDD15_RFO: C28.2 J26.4 U1.23 | length 9.7
  Top Layer w0.254: U1.23@170.927,94.757 171.269,94.415 171.784,94.415 v1(171.831,94.368)
  Layer 1 w0.254: v1(171.831,94.368) 175.683,94.368 175.93,94.615 J26.4
  Bottom Layer w0.254: v1(171.831,94.368) 172.57,94.368 C28.2
VDD15FLO: C19.1 J27.4 U1.71 | length 10.1
  Top Layer w0.152: v1(160.263,101.346) 160.263,101.393 160.462,101.592 U1.71
  Layer 1 w0.152: J27.4 155.456,103.759 158.424,100.791 159.709,100.791 v1(160.263,101.346)
  Bottom Layer w0.152: v1(160.263,101.346) 160.33,101.412 160.587,101.412 160.756,101.581 161.055,101.581 C19.1
VDD15MCUO: C18.1 J27.2 U1.69 | length 8.8
  Top Layer w0.254: v1(159.575,102.968) 159.575,102.919 159.978,102.515 160.375,102.515 160.498,102.392 U1.69@160.986,102.392
  Layer 1 w0.254: J27.2 154.716,105.029 155.301,104.444 155.301,104.439 156.772,102.968 v1(159.575,102.968)
  Bottom Layer w0.254: C18.1 159.07,102.856 159.07,102.952 159.086,102.968 v1(159.575,102.968)
VDD15RTC: C14.1 J1.1 U1.58 | length 14.6
  Top Layer w0.152: U1.58 165.116,104.387 165.204,104.475 165.204,104.903 v1(165.255,104.954)
  Bottom Layer w0.152: C14.1 164.61,105.268 164.88,105.268 165.194,104.954 v1(165.255,104.954) ; v1@165.225,104.923 166.452,104.923 166.618,105.088 166.819,105.088 172.585,110.854 172.585,111.882 171.831,112.635 J1.1
VDD18GO: C9.1 C13.1 C26.2 C31.2 C32.2 J26.14 R52.1 R53.2 R54.1 U1.1 U1.8 U1.34 U1.45 U1.52 | length 44.7
  Top Layer w0.152: R52.1 158.438,90.464 158.789,90.464 158.829,90.424 159.161,90.424 159.486,90.749 160.76,90.749 161.085,91.074 161.462,91.074 161.836,91.448 R54.1 161.908,91.57 C13.1@161.908,92.525 ; C13.1 161.856,92.525 C13.1@161.908,92.525 ; C13.1@161.908,92.71 v1(161.908,93.428) U1.1@161.908,94.146 ; U1.8@164.708,94.146 v1(164.708,93.364) 164.708,93.022 C9.1 C13.1@161.908,92.525 ; U1.52 167.516,104.08 167.54,104.104 167.54,104.196 167.588,104.244 167.588,104.406 167.895,104.713 v1(167.895,104.775) ; U1.45 170.303,103.892 170.303,103.846 170.327,103.87 170.327,104.091 v1@170.648,104.411 ; v1@170.666,104.543 170.955,104.833 C32.2 ; U1.34@170.966,99.188 v1(171.679,99.188) 172.393,99.188 C31.2
  Layer 1 w0.152: v1(164.708,93.364) 164.708,94.183 165.394,94.869 169.652,94.869 171.198,96.415 171.198,98.707 v1(171.679,99.188) ; v1(167.895,104.775) 170.434,104.775 v1(170.688,104.521) 170.688,101.6 171.679,100.609 v1(171.679,99.188) ; J26.14 178.212,100.965 177.196,99.949 175.09,99.949 174.329,99.188 v1(171.679,99.188)
  Bottom Layer w0.152: R53.2 161.253,93.992 161.817,93.428 v1(161.908,93.428) ; v1(167.895,104.775) 167.895,103.833 C26.2
VDD22_RFI: C23.1 J26.2 L3.2 R58.1 U1.15 | length 17.1
  Top Layer w0.254: U1.15 167.52,94.071 167.52,93.605 167.594,93.531 v1(167.594,93.464)
  Layer 1 w0.254: v1(167.594,93.464) 168.549,93.464 168.812,93.201 173.846,93.201 174.244,93.599 175.93,93.599 176.184,93.345 J26.2
  Bottom Layer w0.254: v1(167.594,93.464) 167.641,93.417 167.641,93.159 168.001,92.799 R58.1 168.041,92.799 168.204,92.962 168.204,93.002 168.438,93.236 C23.1 170.688,94.633 L3.2
VDD22DCDC: J1.19 R56.2 | length 5.6
  Top Layer w0.152: J1.19 159.647,112.086 159.647,110.907 160.089,110.466 160.362,110.466 161.036,109.792 R56.2
VDD22LDO_FB: C10.1 C11.2 C15.2 J26.6 L1.2 L3.1 R57.1 U1.64 U1.70 | length 41.9
  Top Layer w0.254: v1(160.135,101.986) U1.70@161.055,101.986 ; v1(162.687,104.634) 162.716,104.605 U1.64
  Bottom Layer w0.254: R57.1 C15.2 ; v1(160.135,101.986) 159.876,101.727 C15.2 ; v1(160.135,101.986) 160.205,101.986 160.454,102.235 C10.1 ; J26.6 177.144,95.885 176.013,94.754 173.193,94.754 171.602,96.345 L3.1 170.688,101.723 169.537,102.874 164.879,102.874 C11.2 163.838,103.915 163.406,103.915 v1(162.687,104.634) 161.795,105.526 L1.2 160.313,105.667 156.485,105.667 155.993,105.174 155.993,102.942 156.502,102.434 157.829,102.434 157.864,102.468 158.112,102.468 158.147,102.434 158.736,102.434 159.016,102.153 159.016,102.038 C15.2
VDDH43: C12.1 C63.2 J26.17 J26.19 U1.59 U1.67 | length 32.4
  Top Layer w0.152: v1(164.64,104.588) 164.692,104.536 164.692,103.929 U1.59
  Top Layer w0.254: v1(161.065,103.697) 161.112,103.65 U1.67@161.112,103.219
  Layer 1 w0.152: J26.19@179.705,104.902 J26.19
  Layer 1 w0.254: v1(161.065,103.697) 163.749,103.697 v1(164.64,104.588) 164.707,104.588 164.856,104.439 165.909,104.439 166.533,105.063 166.85,105.063 167.578,105.791 170.903,105.791 173.609,103.085 175.492,103.085 176.851,104.444 176.851,104.91 178.367,106.426 180.694,106.426 181.266,105.855 181.266,104.838 ; J26.17 180.948,103.505 181.266,103.822 181.266,104.838 ; J26.19 179.895,104.838 181.266,104.838
  Bottom Layer w0.152: v1(164.64,104.588) 164.64,104.531 C12.1
  Bottom Layer w0.254: v1(161.065,103.697) 161.112,103.65 161.112,103.251 161.103,103.242 C63.2
WKUP: R24.1 U1.60 | length 3.8
  Top Layer w0.178: R24.1 163.903,107.392 163.903,104.634 164.258,104.28 164.258,104.276 164.305,104.228 164.305,103.916 U1.60
XTAL_HFn: C24.2 C25.1 U1.32 | length 5.2
  Top Layer w0.178: U1.32@170.966,98.388 170.975,98.397 171.676,98.397 v1(171.704,98.425)
  Bottom Layer w0.178: v1(171.704,98.425) 172.417,99.138 172.417,99.909 173.09,100.582 173.639,100.582 C25.1 C24.2
pads on no net: J1.3 J1.5 J26.1 J26.7 J27.1 U1.0 U1.2 U1.3 U1.4 U1.5 U1.6 U1.7 U1.9 U1.10 U1.11 U1.12 U1.33 U1.35 U1.36 U1.37 U1.38 U1.39 U1.40 U1.41 U1.42 U1.50 U1.51 U1.56 U1.61 U1.83 U1.84 U1.85 U1.86 U1.87 U1.88

## Polygon pours and split planes (outlines as drawn)
Gnd on Bottom Layer "GND_L04_P009" (solid, remove dead copper, pour order 9): 136.398,126.111 178.943,126.111 193.675,111.379 193.675,88.9 177.927,73.152 143.248,73.152 134.493,81.907 134.493,92.837
Gnd on Bottom Layer "NONET_L04_P007" (solid, remove dead copper, shelved, pour order 7): 36.322,123.825 132.334,123.825 132.334,48.26 36.322,48.26
Gnd on Top Layer "GND_L01_P011" (solid, remove dead copper, pour order 11): 151.765,129.413 176.149,129.413 192.659,112.903 192.659,84.455 180.34,72.136 150.622,72.136 136.525,86.233 136.525,105.068
Gnd on Top Layer "NONET_L01_P006" (solid, remove dead copper, shelved, pour order 6): 132.334,123.825 36.322,123.825 36.322,48.26 132.334,48.26
Gnd on Layer 2 "GND_L03_P008" (solid, remove dead copper, pour order 8): 144.653,124.079 178.308,124.079 191.135,111.252 191.135,89.027 175.641,73.533 175.26,73.914 153.416,73.914 139.065,88.265 139.065,104.002
Gnd on Layer 1 "GND_L02_P010" (solid, remove dead copper, pour order 10): 150.114,126.111 179.07,126.111 191.77,113.411 191.77,82.677 183.261,74.168 151.003,74.168 137.541,87.63 137.668,87.757 137.668,119.761

## Keep-outs
Keep-Out Layer:
  circle w0.254: c166.076,99.173 r18.55

## Other copper
Top Layer:
  rectangle net Gnd: 161.732,94.604 170.499,103.376

## Silkscreen, mask and mechanical layers (free items; w line width, h text height)
Bottom Overlay:
  text "ASIC Test adapter v1.0 / WUT ISE 2022.04" at 184.658,105.54 h1.02
Mechanical 1:
  circle w0.254: c166.076,99.173 r24.6
Mechanical 2:
  lines w0.254: 144.526,99.173 cw(c166.076,99.173) 155.301,117.836 ; 155.301,80.51 ccw(c166.076,99.173) 176.851,80.51 ; 176.851,117.836 cw(c166.076,99.173) 187.626,99.173